# EAGLE board Qwiic_1.8V_Adapter-Panel (EAGLE 9.5.2), part 1 of 3
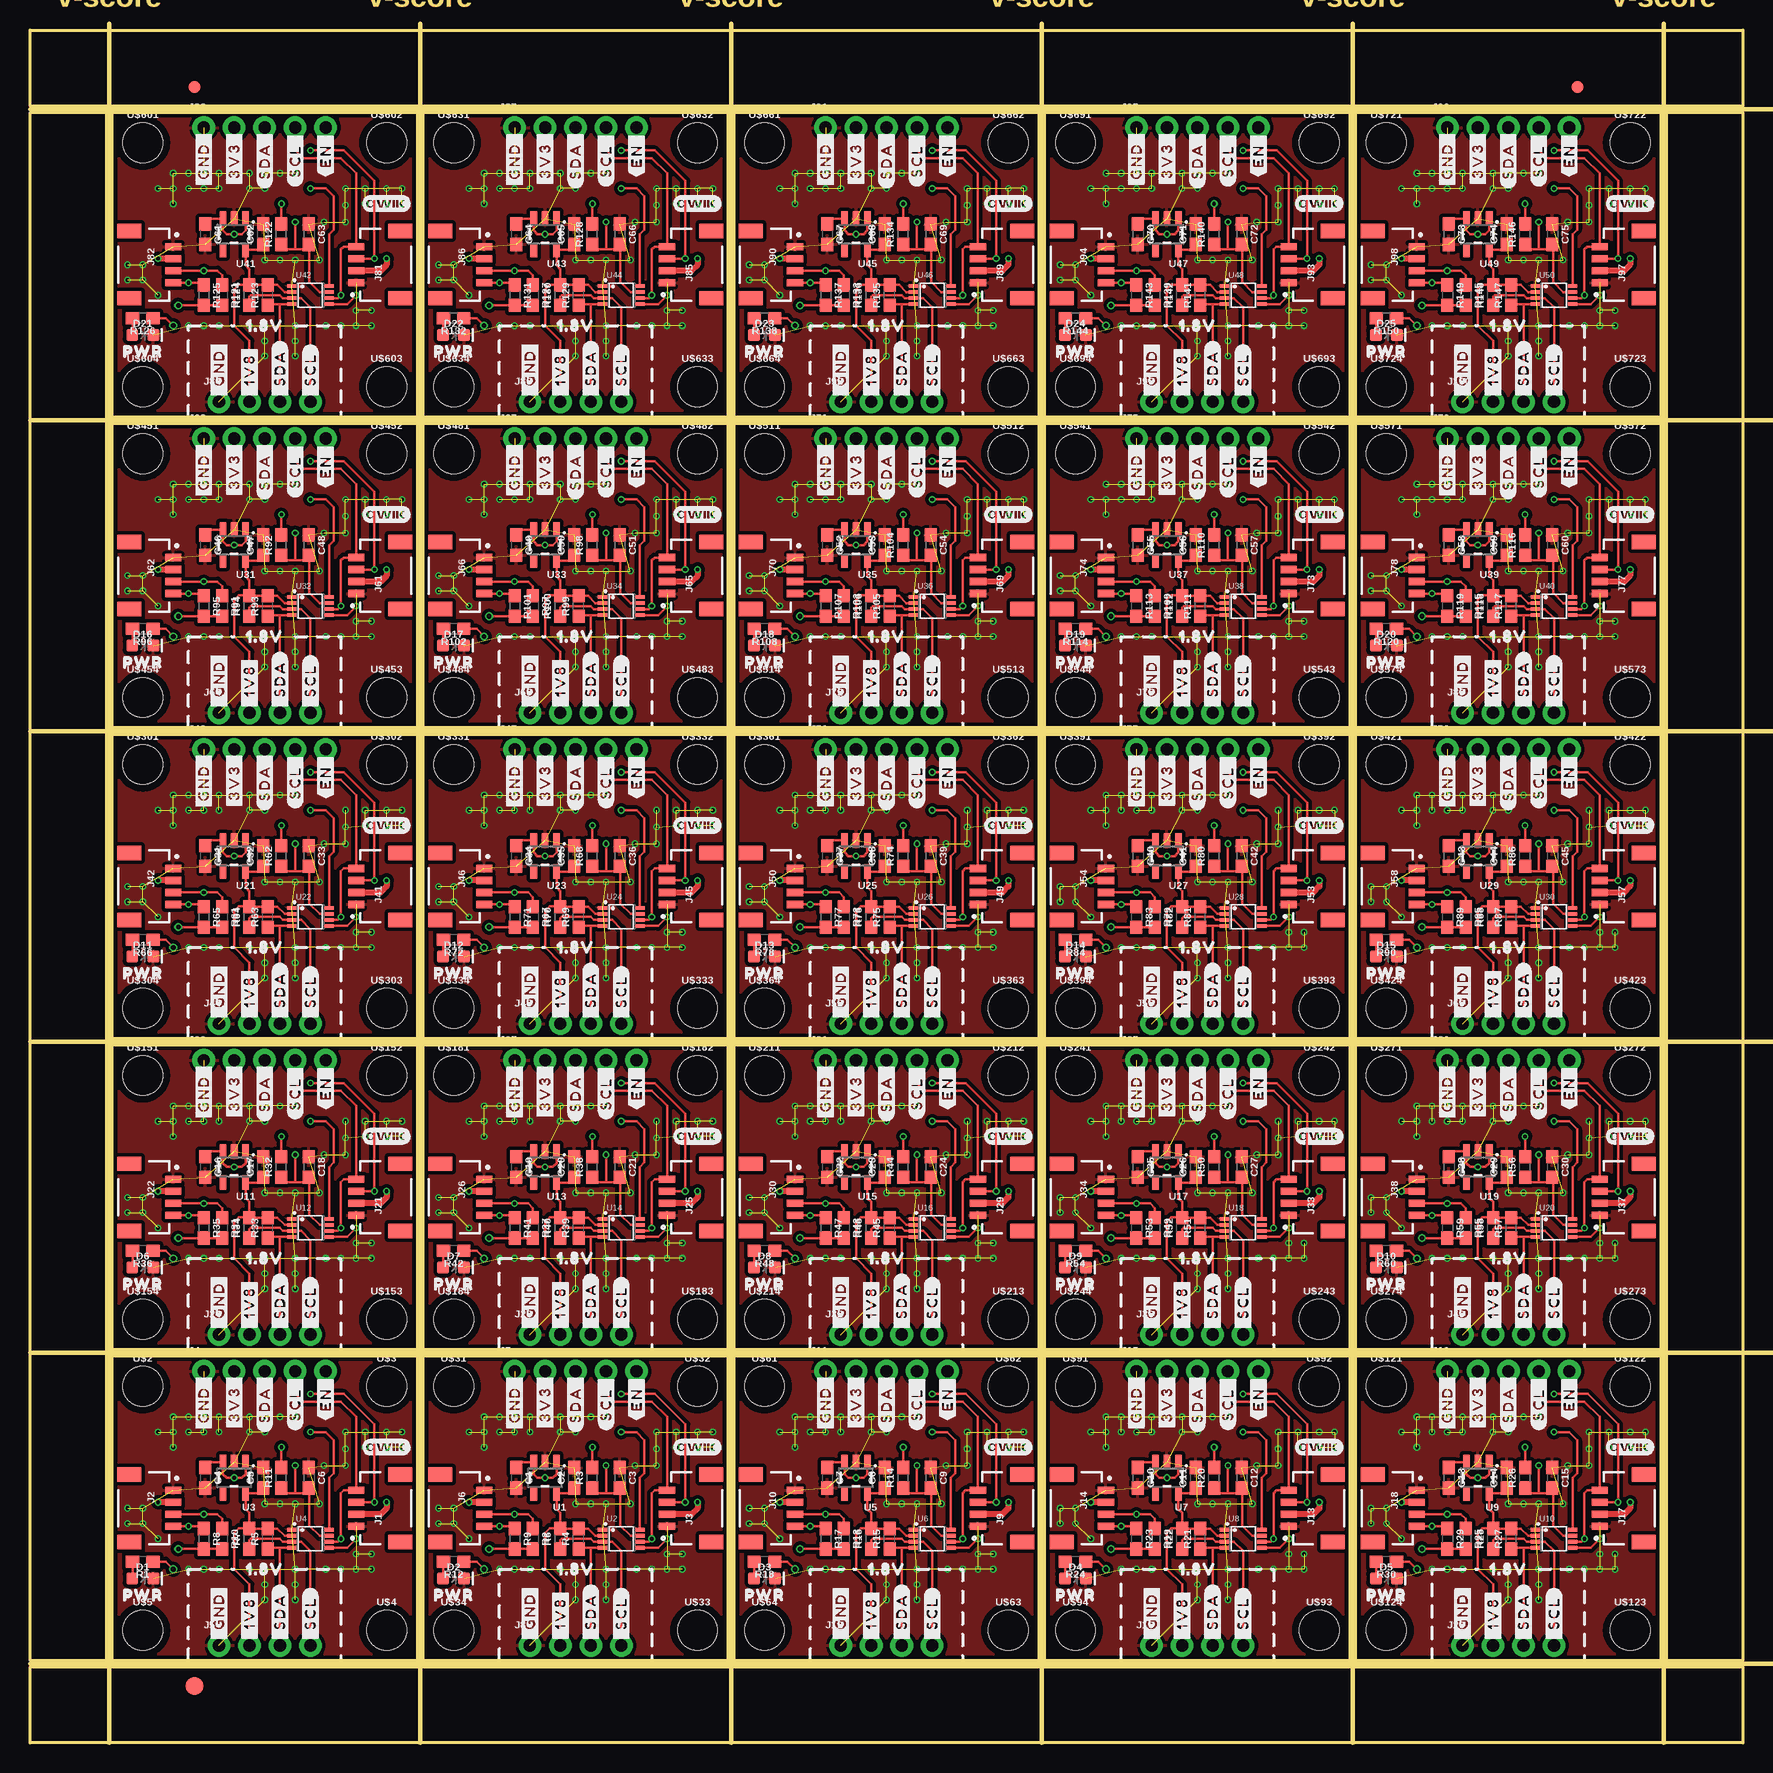
[diagram p0: board, top side]
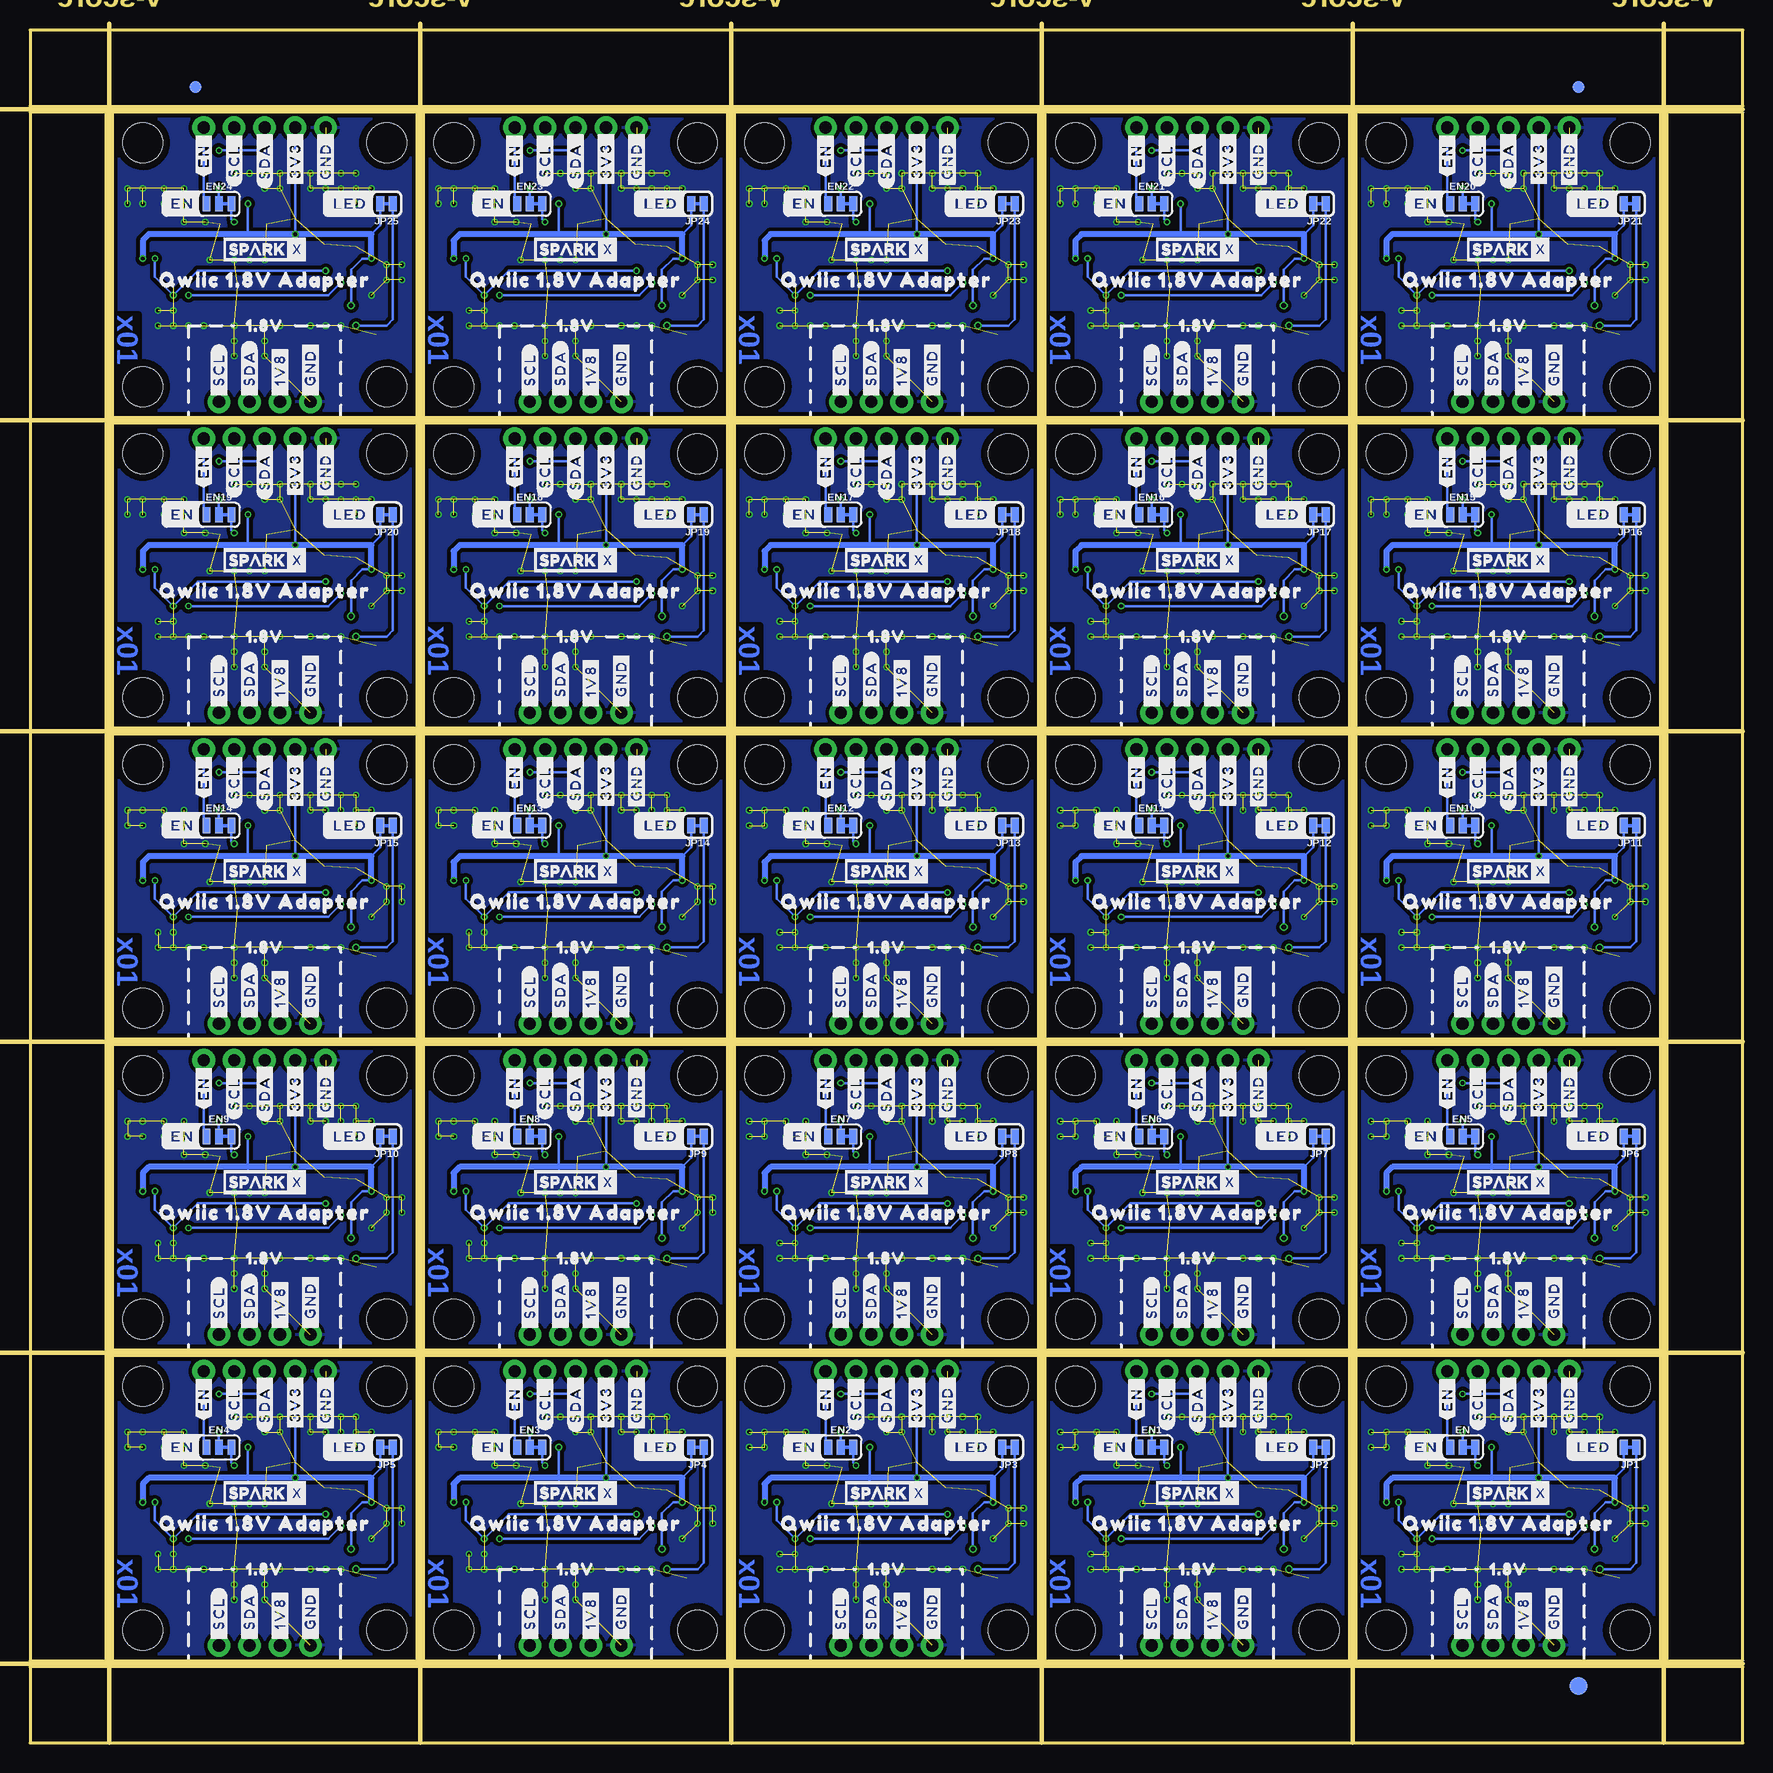
[diagram p1: board, bottom side, seen from below]

Size 142.75 x 142.75 mm. Coordinates in mm from the lower left corner, seen from the top.
Outline: 6.86,6.86 6.86,32.26 32.26,32.26 32.26,6.86 6.86,6.86
Outline: 32.77,6.86 32.77,32.26 58.17,32.26 58.17,6.86 32.77,6.86
Outline: 58.67,6.86 58.67,32.26 84.07,32.26 84.07,6.86 58.67,6.86
Outline: 84.58,6.86 84.58,32.26 109.98,32.26 109.98,6.86 84.58,6.86
Outline: 110.49,6.86 110.49,32.26 135.89,32.26 135.89,6.86 110.49,6.86
Outline: 6.86,32.77 6.86,58.17 32.26,58.17 32.26,32.77 6.86,32.77
Outline: 32.77,32.77 32.77,58.17 58.17,58.17 58.17,32.77 32.77,32.77
Outline: 58.67,32.77 58.67,58.17 84.07,58.17 84.07,32.77 58.67,32.77
Outline: 84.58,32.77 84.58,58.17 109.98,58.17 109.98,32.77 84.58,32.77
Outline: 110.49,32.77 110.49,58.17 135.89,58.17 135.89,32.77 110.49,32.77
Outline: 6.86,58.67 6.86,84.07 32.26,84.07 32.26,58.67 6.86,58.67
Outline: 32.77,58.67 32.77,84.07 58.17,84.07 58.17,58.67 32.77,58.67
Outline: 58.67,58.67 58.67,84.07 84.07,84.07 84.07,58.67 58.67,58.67
Outline: 84.58,58.67 84.58,84.07 109.98,84.07 109.98,58.67 84.58,58.67
Outline: 110.49,58.67 110.49,84.07 135.89,84.07 135.89,58.67 110.49,58.67
Outline: 6.86,84.58 6.86,109.98 32.26,109.98 32.26,84.58 6.86,84.58
Outline: 32.77,84.58 32.77,109.98 58.17,109.98 58.17,84.58 32.77,84.58
Outline: 58.67,84.58 58.67,109.98 84.07,109.98 84.07,84.58 58.67,84.58
Outline: 84.58,84.58 84.58,109.98 109.98,109.98 109.98,84.58 84.58,84.58
Outline: 110.49,84.58 110.49,109.98 135.89,109.98 135.89,84.58 110.49,84.58
Outline: 6.86,110.49 6.86,135.89 32.26,135.89 32.26,110.49 6.86,110.49
Outline: 32.77,110.49 32.77,135.89 58.17,135.89 58.17,110.49 32.77,110.49
Outline: 58.67,110.49 58.67,135.89 84.07,135.89 84.07,110.49 58.67,110.49
Outline: 84.58,110.49 84.58,135.89 109.98,135.89 109.98,110.49 84.58,110.49
Outline: 110.49,110.49 110.49,135.89 135.89,135.89 135.89,110.49 110.49,110.49
Outline: 0,6.35 142.75,6.35 142.75,0 0,0 0,6.35
Outline: 136.4,135.89 142.75,135.89 142.75,6.86 136.4,6.86 136.4,135.89
Outline: 0,142.75 142.75,142.75 142.75,136.4 0,136.4 0,142.75
Outline: 0,135.89 6.35,135.89 6.35,6.86 0,6.86 0,135.89
Copper layers (1*16): Top 0.035mm / dielectric 1.5mm / Bottom 0.035mm
Design rules "Qwiic_1.8V_Adapter": minimum track width 5mil, minimum drill 0.3mm, track to track 5mil, track to pad 5mil, pad to pad 5mil, via to via 5mil, smd to smd 5mil, copper to edge 7mil, drill to drill 7mil, minimum pad ring 5mil, minimum via ring 5mil, stop-mask expansion 4mil, vias tented up to drill 25mil, thermal gap 10mil
Milling: 12 lines

## Footprints (pad centres in the part's own frame; a part is rotated, then mirrored left to right if it is on the bottom)
0603 = smd 1.1 x 1: 1 -0.85,0; 2 0.85,0
LED-0603 = smd 1 x 1: A -0.877,0; C 0.877,0
FIDUCIAL-1X2 = smd 1 x 1: 1 0,0
FIDUCIAL-1.5X3 = smd 1.5 x 1.5: 1 0,0
SMT-JUMPER_3_1-NC_TRACE_SILK = smd 0.66 x 1.27: 1 -1.041,0; 2 0,0; 3 1.041,0
JST04_1MM_RA = smd 0.6 x 1.35: 1 -1.5,0; 2 -0.5,0; 3 0.5,0; 4 1.5,0 | smd 1.2 x 2: NC1 2.8,-3.675; NC2 -2.8,-3.675
1X05_NO_SILK = drill 1.016 pad 1.88: 1 0,0; 2 2.54,0; 3 5.08,0; 4 7.62,0; 5 10.16,0
1X04_NO_SILK = drill 1.016 pad 1.88: 1 0,0; 2 2.54,0; 3 5.08,0; 4 7.62,0
SMT-JUMPER_2_NC_TRACE_SILK = smd 0.66 x 1.27: 1 -0.521,0; 2 0.521,0
SOT23-5 = smd 0.55 x 1.2: 1 -0.95,-1.3; 2 0,-1.3; 3 0.95,-1.3; 4 0.95,1.3; 5 -0.95,1.3
VSSOP_8PIN = smd 0.8 x 0.3: P1 -1.55,0.75; P2 -1.55,0.25; P3 -1.55,-0.25; P4 -1.55,-0.75; P5 1.55,-0.75; P6 1.55,-0.25; P7 1.55,0.25; P8 1.55,0.75
STAND-OFF = hole 3.302: 0,0

## Placement (x,y rotation side)
C1  1.0uF  [0603]  40.51,22.1 270 top
C2  1.0uF  [0603]  45.34,22.1 90 top
C3  100pF  [0603]  49.15,22.1 270 top
C4  1.0uF  [0603]  14.61,22.1 270 top
C5  1.0uF  [0603]  19.43,22.1 90 top
C6  100pF  [0603]  23.24,22.1 270 top
C7  1.0uF  [0603]  66.42,22.1 270 top
C8  1.0uF  [0603]  71.25,22.1 90 top
C9  100pF  [0603]  75.06,22.1 270 top
C10  1.0uF  [0603]  92.33,22.1 270 top
C11  1.0uF  [0603]  97.16,22.1 90 top
C12  100pF  [0603]  100.97,22.1 270 top
C13  1.0uF  [0603]  118.24,22.1 270 top
C14  1.0uF  [0603]  123.06,22.1 90 top
C15  100pF  [0603]  126.87,22.1 270 top
C16  1.0uF  [0603]  14.61,48.01 270 top
C17  1.0uF  [0603]  19.43,48.01 90 top
C18  100pF  [0603]  23.24,48.01 270 top
C19  1.0uF  [0603]  40.51,48.01 270 top
C20  1.0uF  [0603]  45.34,48.01 90 top
C21  100pF  [0603]  49.15,48.01 270 top
C22  1.0uF  [0603]  66.42,48.01 270 top
C23  1.0uF  [0603]  71.25,48.01 90 top
C24  100pF  [0603]  75.06,48.01 270 top
C25  1.0uF  [0603]  92.33,48.01 270 top
C26  1.0uF  [0603]  97.16,48.01 90 top
C27  100pF  [0603]  100.97,48.01 270 top
C28  1.0uF  [0603]  118.24,48.01 270 top
C29  1.0uF  [0603]  123.06,48.01 90 top
C30  100pF  [0603]  126.87,48.01 270 top
C31  1.0uF  [0603]  14.61,73.91 270 top
C32  1.0uF  [0603]  19.43,73.91 90 top
C33  100pF  [0603]  23.24,73.91 270 top
C34  1.0uF  [0603]  40.51,73.91 270 top
C35  1.0uF  [0603]  45.34,73.91 90 top
C36  100pF  [0603]  49.15,73.91 270 top
C37  1.0uF  [0603]  66.42,73.91 270 top
C38  1.0uF  [0603]  71.25,73.91 90 top
C39  100pF  [0603]  75.06,73.91 270 top
C40  1.0uF  [0603]  92.33,73.91 270 top
C41  1.0uF  [0603]  97.16,73.91 90 top
C42  100pF  [0603]  100.97,73.91 270 top
C43  1.0uF  [0603]  118.24,73.91 270 top
C44  1.0uF  [0603]  123.06,73.91 90 top
C45  100pF  [0603]  126.87,73.91 270 top
C46  1.0uF  [0603]  14.61,99.82 270 top
C47  1.0uF  [0603]  19.43,99.82 90 top
C48  100pF  [0603]  23.24,99.82 270 top
C49  1.0uF  [0603]  40.51,99.82 270 top
C50  1.0uF  [0603]  45.34,99.82 90 top
C51  100pF  [0603]  49.15,99.82 270 top
C52  1.0uF  [0603]  66.42,99.82 270 top
C53  1.0uF  [0603]  71.25,99.82 90 top
C54  100pF  [0603]  75.06,99.82 270 top
C55  1.0uF  [0603]  92.33,99.82 270 top
C56  1.0uF  [0603]  97.16,99.82 90 top
C57  100pF  [0603]  100.97,99.82 270 top
C58  1.0uF  [0603]  118.24,99.82 270 top
C59  1.0uF  [0603]  123.06,99.82 90 top
C60  100pF  [0603]  126.87,99.82 270 top
C61  1.0uF  [0603]  14.61,125.73 270 top
C62  1.0uF  [0603]  19.43,125.73 90 top
C63  100pF  [0603]  23.24,125.73 270 top
C64  1.0uF  [0603]  40.51,125.73 270 top
C65  1.0uF  [0603]  45.34,125.73 90 top
C66  100pF  [0603]  49.15,125.73 270 top
C67  1.0uF  [0603]  66.42,125.73 270 top
C68  1.0uF  [0603]  71.25,125.73 90 top
C69  100pF  [0603]  75.06,125.73 270 top
C70  1.0uF  [0603]  92.33,125.73 270 top
C71  1.0uF  [0603]  97.16,125.73 90 top
C72  100pF  [0603]  100.97,125.73 270 top
C73  1.0uF  [0603]  118.24,125.73 270 top
C74  1.0uF  [0603]  123.06,125.73 90 top
C75  100pF  [0603]  126.87,125.73 270 top
D1  RED  [LED-0603]  9.4,13.72 0 top
D2  RED  [LED-0603]  35.31,13.72 0 top
D3  RED  [LED-0603]  61.21,13.72 0 top
D4  RED  [LED-0603]  87.12,13.72 0 top
D5  RED  [LED-0603]  113.03,13.72 0 top
D6  RED  [LED-0603]  9.4,39.62 0 top
D7  RED  [LED-0603]  35.31,39.62 0 top
D8  RED  [LED-0603]  61.21,39.62 0 top
D9  RED  [LED-0603]  87.12,39.62 0 top
D10  RED  [LED-0603]  113.03,39.62 0 top
D11  RED  [LED-0603]  9.4,65.53 0 top
D12  RED  [LED-0603]  35.31,65.53 0 top
D13  RED  [LED-0603]  61.21,65.53 0 top
D14  RED  [LED-0603]  87.12,65.53 0 top
D15  RED  [LED-0603]  113.03,65.53 0 top
D16  RED  [LED-0603]  9.4,91.44 0 top
D17  RED  [LED-0603]  35.31,91.44 0 top
D18  RED  [LED-0603]  61.21,91.44 0 top
D19  RED  [LED-0603]  87.12,91.44 0 top
D20  RED  [LED-0603]  113.03,91.44 0 top
D21  RED  [LED-0603]  9.4,117.35 0 top
D22  RED  [LED-0603]  35.31,117.35 0 top
D23  RED  [LED-0603]  61.21,117.35 0 top
D24  RED  [LED-0603]  87.12,117.35 0 top
D25  RED  [LED-0603]  113.03,117.35 0 top
E$1  [FIDUCIAL-1X2]  13.72,137.99 0 top
E$2  [FIDUCIAL-1X2]  13.72,137.99 0 bottom
E$3  [FIDUCIAL-1X2]  128.97,137.99 0 top
E$4  [FIDUCIAL-1X2]  128.97,137.99 0 bottom
E$5  [FIDUCIAL-1.5X3]  13.72,4.76 0 top
E$6  [FIDUCIAL-1.5X3]  13.72,4.76 0 bottom
EN  JUMPER-SMT_3_1-NC_TRACE_SILK  [SMT-JUMPER_3_1-NC_TRACE_SILK]  23.37,24.64 0 bottom
EN1  JUMPER-SMT_3_1-NC_TRACE_SILK  [SMT-JUMPER_3_1-NC_TRACE_SILK]  49.28,24.64 0 bottom
EN2  JUMPER-SMT_3_1-NC_TRACE_SILK  [SMT-JUMPER_3_1-NC_TRACE_SILK]  75.18,24.64 0 bottom
EN3  JUMPER-SMT_3_1-NC_TRACE_SILK  [SMT-JUMPER_3_1-NC_TRACE_SILK]  101.09,24.64 0 bottom
EN4  JUMPER-SMT_3_1-NC_TRACE_SILK  [SMT-JUMPER_3_1-NC_TRACE_SILK]  127,24.64 0 bottom
EN5  JUMPER-SMT_3_1-NC_TRACE_SILK  [SMT-JUMPER_3_1-NC_TRACE_SILK]  23.37,50.55 0 bottom
EN6  JUMPER-SMT_3_1-NC_TRACE_SILK  [SMT-JUMPER_3_1-NC_TRACE_SILK]  49.28,50.55 0 bottom
EN7  JUMPER-SMT_3_1-NC_TRACE_SILK  [SMT-JUMPER_3_1-NC_TRACE_SILK]  75.18,50.55 0 bottom
EN8  JUMPER-SMT_3_1-NC_TRACE_SILK  [SMT-JUMPER_3_1-NC_TRACE_SILK]  101.09,50.55 0 bottom
EN9  JUMPER-SMT_3_1-NC_TRACE_SILK  [SMT-JUMPER_3_1-NC_TRACE_SILK]  127,50.55 0 bottom
EN10  JUMPER-SMT_3_1-NC_TRACE_SILK  [SMT-JUMPER_3_1-NC_TRACE_SILK]  23.37,76.45 0 bottom
EN11  JUMPER-SMT_3_1-NC_TRACE_SILK  [SMT-JUMPER_3_1-NC_TRACE_SILK]  49.28,76.45 0 bottom
EN12  JUMPER-SMT_3_1-NC_TRACE_SILK  [SMT-JUMPER_3_1-NC_TRACE_SILK]  75.18,76.45 0 bottom
EN13  JUMPER-SMT_3_1-NC_TRACE_SILK  [SMT-JUMPER_3_1-NC_TRACE_SILK]  101.09,76.45 0 bottom
EN14  JUMPER-SMT_3_1-NC_TRACE_SILK  [SMT-JUMPER_3_1-NC_TRACE_SILK]  127,76.45 0 bottom
EN15  JUMPER-SMT_3_1-NC_TRACE_SILK  [SMT-JUMPER_3_1-NC_TRACE_SILK]  23.37,102.36 0 bottom
EN16  JUMPER-SMT_3_1-NC_TRACE_SILK  [SMT-JUMPER_3_1-NC_TRACE_SILK]  49.28,102.36 0 bottom
EN17  JUMPER-SMT_3_1-NC_TRACE_SILK  [SMT-JUMPER_3_1-NC_TRACE_SILK]  75.18,102.36 0 bottom
EN18  JUMPER-SMT_3_1-NC_TRACE_SILK  [SMT-JUMPER_3_1-NC_TRACE_SILK]  101.09,102.36 0 bottom
EN19  JUMPER-SMT_3_1-NC_TRACE_SILK  [SMT-JUMPER_3_1-NC_TRACE_SILK]  127,102.36 0 bottom
EN20  JUMPER-SMT_3_1-NC_TRACE_SILK  [SMT-JUMPER_3_1-NC_TRACE_SILK]  23.37,128.27 0 bottom
EN21  JUMPER-SMT_3_1-NC_TRACE_SILK  [SMT-JUMPER_3_1-NC_TRACE_SILK]  49.28,128.27 0 bottom
EN22  JUMPER-SMT_3_1-NC_TRACE_SILK  [SMT-JUMPER_3_1-NC_TRACE_SILK]  75.18,128.27 0 bottom
EN23  JUMPER-SMT_3_1-NC_TRACE_SILK  [SMT-JUMPER_3_1-NC_TRACE_SILK]  101.09,128.27 0 bottom
EN24  JUMPER-SMT_3_1-NC_TRACE_SILK  [SMT-JUMPER_3_1-NC_TRACE_SILK]  127,128.27 0 bottom
J1  QWIIC_RIGHT_ANGLE  [JST04_1MM_RA]  27.18,19.56 90 top
J2  QWIIC_RIGHT_ANGLE  [JST04_1MM_RA]  11.94,19.56 270 top
J3  QWIIC_RIGHT_ANGLE  [JST04_1MM_RA]  53.09,19.56 90 top
J4  [1X05_NO_SILK]  14.48,30.99 0 top
J5  [1X04_NO_SILK]  15.75,8.13 0 top
J6  QWIIC_RIGHT_ANGLE  [JST04_1MM_RA]  37.85,19.56 270 top
J7  [1X05_NO_SILK]  40.39,30.99 0 top
J8  [1X04_NO_SILK]  41.66,8.13 0 top
J9  QWIIC_RIGHT_ANGLE  [JST04_1MM_RA]  78.99,19.56 90 top
J10  QWIIC_RIGHT_ANGLE  [JST04_1MM_RA]  63.75,19.56 270 top
J11  [1X05_NO_SILK]  66.29,30.99 0 top
J12  [1X04_NO_SILK]  67.56,8.13 0 top
J13  QWIIC_RIGHT_ANGLE  [JST04_1MM_RA]  104.9,19.56 90 top
J14  QWIIC_RIGHT_ANGLE  [JST04_1MM_RA]  89.66,19.56 270 top
J15  [1X05_NO_SILK]  92.2,30.99 0 top
J16  [1X04_NO_SILK]  93.47,8.13 0 top
J17  QWIIC_RIGHT_ANGLE  [JST04_1MM_RA]  130.81,19.56 90 top
J18  QWIIC_RIGHT_ANGLE  [JST04_1MM_RA]  115.57,19.56 270 top
J19  [1X05_NO_SILK]  118.11,30.99 0 top
J20  [1X04_NO_SILK]  119.38,8.13 0 top
J21  QWIIC_RIGHT_ANGLE  [JST04_1MM_RA]  27.18,45.47 90 top
J22  QWIIC_RIGHT_ANGLE  [JST04_1MM_RA]  11.94,45.47 270 top
J23  [1X05_NO_SILK]  14.48,56.9 0 top
J24  [1X04_NO_SILK]  15.75,34.04 0 top
J25  QWIIC_RIGHT_ANGLE  [JST04_1MM_RA]  53.09,45.47 90 top
J26  QWIIC_RIGHT_ANGLE  [JST04_1MM_RA]  37.85,45.47 270 top
J27  [1X05_NO_SILK]  40.39,56.9 0 top
J28  [1X04_NO_SILK]  41.66,34.04 0 top
J29  QWIIC_RIGHT_ANGLE  [JST04_1MM_RA]  78.99,45.47 90 top
J30  QWIIC_RIGHT_ANGLE  [JST04_1MM_RA]  63.75,45.47 270 top
J31  [1X05_NO_SILK]  66.29,56.9 0 top
J32  [1X04_NO_SILK]  67.56,34.04 0 top
J33  QWIIC_RIGHT_ANGLE  [JST04_1MM_RA]  104.9,45.47 90 top
J34  QWIIC_RIGHT_ANGLE  [JST04_1MM_RA]  89.66,45.47 270 top
J35  [1X05_NO_SILK]  92.2,56.9 0 top
J36  [1X04_NO_SILK]  93.47,34.04 0 top
J37  QWIIC_RIGHT_ANGLE  [JST04_1MM_RA]  130.81,45.47 90 top
J38  QWIIC_RIGHT_ANGLE  [JST04_1MM_RA]  115.57,45.47 270 top
J39  [1X05_NO_SILK]  118.11,56.9 0 top
J40  [1X04_NO_SILK]  119.38,34.04 0 top
J41  QWIIC_RIGHT_ANGLE  [JST04_1MM_RA]  27.18,71.37 90 top
J42  QWIIC_RIGHT_ANGLE  [JST04_1MM_RA]  11.94,71.37 270 top
J43  [1X05_NO_SILK]  14.48,82.8 0 top
J44  [1X04_NO_SILK]  15.75,59.94 0 top
J45  QWIIC_RIGHT_ANGLE  [JST04_1MM_RA]  53.09,71.37 90 top
J46  QWIIC_RIGHT_ANGLE  [JST04_1MM_RA]  37.85,71.37 270 top
J47  [1X05_NO_SILK]  40.39,82.8 0 top
J48  [1X04_NO_SILK]  41.66,59.94 0 top
J49  QWIIC_RIGHT_ANGLE  [JST04_1MM_RA]  78.99,71.37 90 top
J50  QWIIC_RIGHT_ANGLE  [JST04_1MM_RA]  63.75,71.37 270 top
J51  [1X05_NO_SILK]  66.29,82.8 0 top
J52  [1X04_NO_SILK]  67.56,59.94 0 top
J53  QWIIC_RIGHT_ANGLE  [JST04_1MM_RA]  104.9,71.37 90 top
J54  QWIIC_RIGHT_ANGLE  [JST04_1MM_RA]  89.66,71.37 270 top
J55  [1X05_NO_SILK]  92.2,82.8 0 top
J56  [1X04_NO_SILK]  93.47,59.94 0 top
J57  QWIIC_RIGHT_ANGLE  [JST04_1MM_RA]  130.81,71.37 90 top
J58  QWIIC_RIGHT_ANGLE  [JST04_1MM_RA]  115.57,71.37 270 top
J59  [1X05_NO_SILK]  118.11,82.8 0 top
J60  [1X04_NO_SILK]  119.38,59.94 0 top
J61  QWIIC_RIGHT_ANGLE  [JST04_1MM_RA]  27.18,97.28 90 top
J62  QWIIC_RIGHT_ANGLE  [JST04_1MM_RA]  11.94,97.28 270 top
J63  [1X05_NO_SILK]  14.48,108.71 0 top
J64  [1X04_NO_SILK]  15.75,85.85 0 top
J65  QWIIC_RIGHT_ANGLE  [JST04_1MM_RA]  53.09,97.28 90 top
J66  QWIIC_RIGHT_ANGLE  [JST04_1MM_RA]  37.85,97.28 270 top
J67  [1X05_NO_SILK]  40.39,108.71 0 top
J68  [1X04_NO_SILK]  41.66,85.85 0 top
J69  QWIIC_RIGHT_ANGLE  [JST04_1MM_RA]  78.99,97.28 90 top
J70  QWIIC_RIGHT_ANGLE  [JST04_1MM_RA]  63.75,97.28 270 top
J71  [1X05_NO_SILK]  66.29,108.71 0 top
J72  [1X04_NO_SILK]  67.56,85.85 0 top
J73  QWIIC_RIGHT_ANGLE  [JST04_1MM_RA]  104.9,97.28 90 top
J74  QWIIC_RIGHT_ANGLE  [JST04_1MM_RA]  89.66,97.28 270 top
J75  [1X05_NO_SILK]  92.2,108.71 0 top
J76  [1X04_NO_SILK]  93.47,85.85 0 top
J77  QWIIC_RIGHT_ANGLE  [JST04_1MM_RA]  130.81,97.28 90 top
J78  QWIIC_RIGHT_ANGLE  [JST04_1MM_RA]  115.57,97.28 270 top
J79  [1X05_NO_SILK]  118.11,108.71 0 top
J80  [1X04_NO_SILK]  119.38,85.85 0 top
J81  QWIIC_RIGHT_ANGLE  [JST04_1MM_RA]  27.18,123.19 90 top
J82  QWIIC_RIGHT_ANGLE  [JST04_1MM_RA]  11.94,123.19 270 top
J83  [1X05_NO_SILK]  14.48,134.62 0 top
J84  [1X04_NO_SILK]  15.75,111.76 0 top
J85  QWIIC_RIGHT_ANGLE  [JST04_1MM_RA]  53.09,123.19 90 top
J86  QWIIC_RIGHT_ANGLE  [JST04_1MM_RA]  37.85,123.19 270 top
J87  [1X05_NO_SILK]  40.39,134.62 0 top
J88  [1X04_NO_SILK]  41.66,111.76 0 top
J89  QWIIC_RIGHT_ANGLE  [JST04_1MM_RA]  78.99,123.19 90 top
J90  QWIIC_RIGHT_ANGLE  [JST04_1MM_RA]  63.75,123.19 270 top
J91  [1X05_NO_SILK]  66.29,134.62 0 top
J92  [1X04_NO_SILK]  67.56,111.76 0 top
J93  QWIIC_RIGHT_ANGLE  [JST04_1MM_RA]  104.9,123.19 90 top
J94  QWIIC_RIGHT_ANGLE  [JST04_1MM_RA]  89.66,123.19 270 top
J95  [1X05_NO_SILK]  92.2,134.62 0 top
J96  [1X04_NO_SILK]  93.47,111.76 0 top
J97  QWIIC_RIGHT_ANGLE  [JST04_1MM_RA]  130.81,123.19 90 top
J98  QWIIC_RIGHT_ANGLE  [JST04_1MM_RA]  115.57,123.19 270 top
J99  [1X05_NO_SILK]  118.11,134.62 0 top
J100  [1X04_NO_SILK]  119.38,111.76 0 top
JP1  JUMPER-SMT_2_NC_TRACE_SILK  [SMT-JUMPER_2_NC_TRACE_SILK]  9.4,24.64 180 bottom
JP2  JUMPER-SMT_2_NC_TRACE_SILK  [SMT-JUMPER_2_NC_TRACE_SILK]  35.31,24.64 180 bottom
JP3  JUMPER-SMT_2_NC_TRACE_SILK  [SMT-JUMPER_2_NC_TRACE_SILK]  61.21,24.64 180 bottom
JP4  JUMPER-SMT_2_NC_TRACE_SILK  [SMT-JUMPER_2_NC_TRACE_SILK]  87.12,24.64 180 bottom
JP5  JUMPER-SMT_2_NC_TRACE_SILK  [SMT-JUMPER_2_NC_TRACE_SILK]  113.03,24.64 180 bottom
JP6  JUMPER-SMT_2_NC_TRACE_SILK  [SMT-JUMPER_2_NC_TRACE_SILK]  9.4,50.55 180 bottom
JP7  JUMPER-SMT_2_NC_TRACE_SILK  [SMT-JUMPER_2_NC_TRACE_SILK]  35.31,50.55 180 bottom
JP8  JUMPER-SMT_2_NC_TRACE_SILK  [SMT-JUMPER_2_NC_TRACE_SILK]  61.21,50.55 180 bottom
JP9  JUMPER-SMT_2_NC_TRACE_SILK  [SMT-JUMPER_2_NC_TRACE_SILK]  87.12,50.55 180 bottom
JP10  JUMPER-SMT_2_NC_TRACE_SILK  [SMT-JUMPER_2_NC_TRACE_SILK]  113.03,50.55 180 bottom
JP11  JUMPER-SMT_2_NC_TRACE_SILK  [SMT-JUMPER_2_NC_TRACE_SILK]  9.4,76.45 180 bottom
JP12  JUMPER-SMT_2_NC_TRACE_SILK  [SMT-JUMPER_2_NC_TRACE_SILK]  35.31,76.45 180 bottom
JP13  JUMPER-SMT_2_NC_TRACE_SILK  [SMT-JUMPER_2_NC_TRACE_SILK]  61.21,76.45 180 bottom
JP14  JUMPER-SMT_2_NC_TRACE_SILK  [SMT-JUMPER_2_NC_TRACE_SILK]  87.12,76.45 180 bottom
JP15  JUMPER-SMT_2_NC_TRACE_SILK  [SMT-JUMPER_2_NC_TRACE_SILK]  113.03,76.45 180 bottom
JP16  JUMPER-SMT_2_NC_TRACE_SILK  [SMT-JUMPER_2_NC_TRACE_SILK]  9.4,102.36 180 bottom
JP17  JUMPER-SMT_2_NC_TRACE_SILK  [SMT-JUMPER_2_NC_TRACE_SILK]  35.31,102.36 180 bottom
JP18  JUMPER-SMT_2_NC_TRACE_SILK  [SMT-JUMPER_2_NC_TRACE_SILK]  61.21,102.36 180 bottom
JP19  JUMPER-SMT_2_NC_TRACE_SILK  [SMT-JUMPER_2_NC_TRACE_SILK]  87.12,102.36 180 bottom
JP20  JUMPER-SMT_2_NC_TRACE_SILK  [SMT-JUMPER_2_NC_TRACE_SILK]  113.03,102.36 180 bottom
JP21  JUMPER-SMT_2_NC_TRACE_SILK  [SMT-JUMPER_2_NC_TRACE_SILK]  9.4,128.27 180 bottom
JP22  JUMPER-SMT_2_NC_TRACE_SILK  [SMT-JUMPER_2_NC_TRACE_SILK]  35.31,128.27 180 bottom
JP23  JUMPER-SMT_2_NC_TRACE_SILK  [SMT-JUMPER_2_NC_TRACE_SILK]  61.21,128.27 180 bottom
JP24  JUMPER-SMT_2_NC_TRACE_SILK  [SMT-JUMPER_2_NC_TRACE_SILK]  87.12,128.27 180 bottom
JP25  JUMPER-SMT_2_NC_TRACE_SILK  [SMT-JUMPER_2_NC_TRACE_SILK]  113.03,128.27 180 bottom
R1  1k  [0603]  9.4,15.11 180 top
R2  2.2k  [0603]  41.91,17.02 270 top
R3  200k  [0603]  46.86,22.1 90 top
R4  2.2k  [0603]  45.72,17.02 90 top
R5  2.2k  [0603]  19.81,17.02 90 top
R6  2.2k  [0603]  44.2,17.02 90 top
R7  2.2k  [0603]  18.29,17.02 90 top
R8  2.2k  [0603]  14.48,17.02 270 top
R9  2.2k  [0603]  40.39,17.02 270 top
R10  2.2k  [0603]  16,17.02 270 top
R11  200k  [0603]  20.95,22.1 90 top
R12  1k  [0603]  35.31,15.11 180 top
R13  2.2k  [0603]  67.82,17.02 270 top
R14  200k  [0603]  72.77,22.1 90 top
R15  2.2k  [0603]  71.63,17.02 90 top
R16  2.2k  [0603]  70.1,17.02 90 top
R17  2.2k  [0603]  66.29,17.02 270 top
R18  1k  [0603]  61.21,15.11 180 top
R19  2.2k  [0603]  93.73,17.02 270 top
R20  200k  [0603]  98.68,22.1 90 top
R21  2.2k  [0603]  97.54,17.02 90 top
R22  2.2k  [0603]  96.01,17.02 90 top
R23  2.2k  [0603]  92.2,17.02 270 top
R24  1k  [0603]  87.12,15.11 180 top
R25  2.2k  [0603]  119.63,17.02 270 top
R26  200k  [0603]  124.59,22.1 90 top
R27  2.2k  [0603]  123.44,17.02 90 top
R28  2.2k  [0603]  121.92,17.02 90 top
R29  2.2k  [0603]  118.11,17.02 270 top
R30  1k  [0603]  113.03,15.11 180 top
R31  2.2k  [0603]  16,42.93 270 top
R32  200k  [0603]  20.95,48.01 90 top
R33  2.2k  [0603]  19.81,42.93 90 top
R34  2.2k  [0603]  18.29,42.93 90 top
R35  2.2k  [0603]  14.48,42.93 270 top
R36  1k  [0603]  9.4,41.02 180 top
R37  2.2k  [0603]  41.91,42.93 270 top
R38  200k  [0603]  46.86,48.01 90 top
R39  2.2k  [0603]  45.72,42.93 90 top
R40  2.2k  [0603]  44.2,42.93 90 top
R41  2.2k  [0603]  40.39,42.93 270 top
R42  1k  [0603]  35.31,41.02 180 top
R43  2.2k  [0603]  67.82,42.93 270 top
R44  200k  [0603]  72.77,48.01 90 top
R45  2.2k  [0603]  71.63,42.93 90 top
R46  2.2k  [0603]  70.1,42.93 90 top
R47  2.2k  [0603]  66.29,42.93 270 top
R48  1k  [0603]  61.21,41.02 180 top
R49  2.2k  [0603]  93.73,42.93 270 top
R50  200k  [0603]  98.68,48.01 90 top
R51  2.2k  [0603]  97.54,42.93 90 top
R52  2.2k  [0603]  96.01,42.93 90 top
R53  2.2k  [0603]  92.2,42.93 270 top
R54  1k  [0603]  87.12,41.02 180 top
R55  2.2k  [0603]  119.63,42.93 270 top
R56  200k  [0603]  124.59,48.01 90 top
R57  2.2k  [0603]  123.44,42.93 90 top
R58  2.2k  [0603]  121.92,42.93 90 top
R59  2.2k  [0603]  118.11,42.93 270 top
R60  1k  [0603]  113.03,41.02 180 top
R61  2.2k  [0603]  16,68.83 270 top
R62  200k  [0603]  20.95,73.91 90 top
R63  2.2k  [0603]  19.81,68.83 90 top
R64  2.2k  [0603]  18.29,68.83 90 top
R65  2.2k  [0603]  14.48,68.83 270 top
R66  1k  [0603]  9.4,66.93 180 top
R67  2.2k  [0603]  41.91,68.83 270 top
R68  200k  [0603]  46.86,73.91 90 top
R69  2.2k  [0603]  45.72,68.83 90 top
R70  2.2k  [0603]  44.2,68.83 90 top
R71  2.2k  [0603]  40.39,68.83 270 top
R72  1k  [0603]  35.31,66.93 180 top
R73  2.2k  [0603]  67.82,68.83 270 top
R74  200k  [0603]  72.77,73.91 90 top
R75  2.2k  [0603]  71.63,68.83 90 top
R76  2.2k  [0603]  70.1,68.83 90 top
R77  2.2k  [0603]  66.29,68.83 270 top
R78  1k  [0603]  61.21,66.93 180 top
R79  2.2k  [0603]  93.73,68.83 270 top
R80  200k  [0603]  98.68,73.91 90 top
R81  2.2k  [0603]  97.54,68.83 90 top
R82  2.2k  [0603]  96.01,68.83 90 top
R83  2.2k  [0603]  92.2,68.83 270 top
R84  1k  [0603]  87.12,66.93 180 top
R85  2.2k  [0603]  119.63,68.83 270 top
R86  200k  [0603]  124.59,73.91 90 top
R87  2.2k  [0603]  123.44,68.83 90 top
R88  2.2k  [0603]  121.92,68.83 90 top
R89  2.2k  [0603]  118.11,68.83 270 top
R90  1k  [0603]  113.03,66.93 180 top
R91  2.2k  [0603]  16,94.74 270 top
R92  200k  [0603]  20.95,99.82 90 top
R93  2.2k  [0603]  19.81,94.74 90 top
R94  2.2k  [0603]  18.29,94.74 90 top
R95  2.2k  [0603]  14.48,94.74 270 top
R96  1k  [0603]  9.4,92.84 180 top
R97  2.2k  [0603]  41.91,94.74 270 top
R98  200k  [0603]  46.86,99.82 90 top
R99  2.2k  [0603]  45.72,94.74 90 top
R100  2.2k  [0603]  44.2,94.74 90 top
R101  2.2k  [0603]  40.39,94.74 270 top
R102  1k  [0603]  35.31,92.84 180 top
R103  2.2k  [0603]  67.82,94.74 270 top
R104  200k  [0603]  72.77,99.82 90 top
R105  2.2k  [0603]  71.63,94.74 90 top
R106  2.2k  [0603]  70.1,94.74 90 top
R107  2.2k  [0603]  66.29,94.74 270 top
R108  1k  [0603]  61.21,92.84 180 top
R109  2.2k  [0603]  93.73,94.74 270 top
R110  200k  [0603]  98.68,99.82 90 top
R111  2.2k  [0603]  97.54,94.74 90 top
R112  2.2k  [0603]  96.01,94.74 90 top
R113  2.2k  [0603]  92.2,94.74 270 top
R114  1k  [0603]  87.12,92.84 180 top
R115  2.2k  [0603]  119.63,94.74 270 top
R116  200k  [0603]  124.59,99.82 90 top
R117  2.2k  [0603]  123.44,94.74 90 top
R118  2.2k  [0603]  121.92,94.74 90 top
R119  2.2k  [0603]  118.11,94.74 270 top
R120  1k  [0603]  113.03,92.84 180 top
R121  2.2k  [0603]  16,120.65 270 top
R122  200k  [0603]  20.95,125.73 90 top
R123  2.2k  [0603]  19.81,120.65 90 top
R124  2.2k  [0603]  18.29,120.65 90 top
R125  2.2k  [0603]  14.48,120.65 270 top
R126  1k  [0603]  9.4,118.75 180 top
R127  2.2k  [0603]  41.91,120.65 270 top
R128  200k  [0603]  46.86,125.73 90 top
R129  2.2k  [0603]  45.72,120.65 90 top
R130  2.2k  [0603]  44.2,120.65 90 top
R131  2.2k  [0603]  40.39,120.65 270 top
R132  1k  [0603]  35.31,118.75 180 top
R133  2.2k  [0603]  67.82,120.65 270 top
R134  200k  [0603]  72.77,125.73 90 top
R135  2.2k  [0603]  71.63,120.65 90 top
R136  2.2k  [0603]  70.1,120.65 90 top
R137  2.2k  [0603]  66.29,120.65 270 top
R138  1k  [0603]  61.21,118.75 180 top
R139  2.2k  [0603]  93.73,120.65 270 top
R140  200k  [0603]  98.68,125.73 90 top
R141  2.2k  [0603]  97.54,120.65 90 top
R142  2.2k  [0603]  96.01,120.65 90 top
R143  2.2k  [0603]  92.2,120.65 270 top
R144  1k  [0603]  87.12,118.75 180 top
R145  2.2k  [0603]  119.63,120.65 270 top
R146  200k  [0603]  124.59,125.73 90 top
R147  2.2k  [0603]  123.44,120.65 90 top
R148  2.2k  [0603]  121.92,120.65 90 top
R149  2.2k  [0603]  118.11,120.65 270 top
R150  1k  [0603]  113.03,118.75 180 top
U1  AP2127K-1.8V  [SOT23-5]  42.93,22.1 180 top
U2  [VSSOP_8PIN]  49.28,17.02 0 top
U3  AP2127K-1.8V  [SOT23-5]  17.02,22.1 180 top
U4  [VSSOP_8PIN]  23.37,17.02 0 top
U5  AP2127K-1.8V  [SOT23-5]  68.83,22.1 180 top
U6  [VSSOP_8PIN]  75.18,17.02 0 top
U7  AP2127K-1.8V  [SOT23-5]  94.74,22.1 180 top
U8  [VSSOP_8PIN]  101.09,17.02 0 top
U9  AP2127K-1.8V  [SOT23-5]  120.65,22.1 180 top
U10  [VSSOP_8PIN]  127,17.02 0 top
U11  AP2127K-1.8V  [SOT23-5]  17.02,48.01 180 top
U12  [VSSOP_8PIN]  23.37,42.93 0 top
U13  AP2127K-1.8V  [SOT23-5]  42.93,48.01 180 top
U14  [VSSOP_8PIN]  49.28,42.93 0 top
U15  AP2127K-1.8V  [SOT23-5]  68.83,48.01 180 top
U16  [VSSOP_8PIN]  75.18,42.93 0 top
U17  AP2127K-1.8V  [SOT23-5]  94.74,48.01 180 top
U18  [VSSOP_8PIN]  101.09,42.93 0 top
U19  AP2127K-1.8V  [SOT23-5]  120.65,48.01 180 top
U20  [VSSOP_8PIN]  127,42.93 0 top
U21  AP2127K-1.8V  [SOT23-5]  17.02,73.91 180 top
U22  [VSSOP_8PIN]  23.37,68.83 0 top
U23  AP2127K-1.8V  [SOT23-5]  42.93,73.91 180 top
U24  [VSSOP_8PIN]  49.28,68.83 0 top
U25  AP2127K-1.8V  [SOT23-5]  68.83,73.91 180 top
U26  [VSSOP_8PIN]  75.18,68.83 0 top
U27  AP2127K-1.8V  [SOT23-5]  94.74,73.91 180 top
U28  [VSSOP_8PIN]  101.09,68.83 0 top
U29  AP2127K-1.8V  [SOT23-5]  120.65,73.91 180 top
U30  [VSSOP_8PIN]  127,68.83 0 top
U31  AP2127K-1.8V  [SOT23-5]  17.02,99.82 180 top
U32  [VSSOP_8PIN]  23.37,94.74 0 top
U33  AP2127K-1.8V  [SOT23-5]  42.93,99.82 180 top
U34  [VSSOP_8PIN]  49.28,94.74 0 top
U35  AP2127K-1.8V  [SOT23-5]  68.83,99.82 180 top
U36  [VSSOP_8PIN]  75.18,94.74 0 top
U37  AP2127K-1.8V  [SOT23-5]  94.74,99.82 180 top
U38  [VSSOP_8PIN]  101.09,94.74 0 top
U39  AP2127K-1.8V  [SOT23-5]  120.65,99.82 180 top
U40  [VSSOP_8PIN]  127,94.74 0 top
U41  AP2127K-1.8V  [SOT23-5]  17.02,125.73 180 top
U42  [VSSOP_8PIN]  23.37,120.65 0 top
U43  AP2127K-1.8V  [SOT23-5]  42.93,125.73 180 top
U44  [VSSOP_8PIN]  49.28,120.65 0 top
U45  AP2127K-1.8V  [SOT23-5]  68.83,125.73 180 top
U46  [VSSOP_8PIN]  75.18,120.65 0 top
U47  AP2127K-1.8V  [SOT23-5]  94.74,125.73 180 top
U48  [VSSOP_8PIN]  101.09,120.65 0 top
U49  AP2127K-1.8V  [SOT23-5]  120.65,125.73 180 top
U50  [VSSOP_8PIN]  127,120.65 0 top
U$1  [#_GND#0]  15.75,8.38 90 top
U$2  [STAND-OFF]  9.4,29.72 0 top
U$3  [STAND-OFF]  29.72,29.72 0 top
U$4  [STAND-OFF]  29.72,9.4 0 top
U$5  [STAND-OFF]  9.4,9.4 0 top
U$6  [#_1V8#0]  18.29,8.38 90 top
U$7  [#_SDA#0]  20.83,8.38 90 top
U$8  [#_SCL#0]  23.37,8.38 90 top
U$9  [PWR0]  9.4,12.32 0 top
U$10  [#GND_#0]  14.48,30.73 90 top
U$11  [#3V3_#0]  17.02,30.73 90 top
U$12  [#SDA_#0]  19.56,30.73 90 top
U$13  [#SCL_#0]  22.1,30.61 90 top
U$14  [#EN_#0]  24.64,30.61 90 top
U$15  [1#8V0]  19.56,14.48 0 top
U$16  [QWIIC_4MM]  29.72,24.64 0 top
U$17  [#_GND#0]  15.75,8.38 90 bottom
U$18  [#_1V8#0]  18.29,8.38 90 bottom
U$19  [#_SDA#0]  20.83,8.38 90 bottom
U$20  [#_SCL#0]  23.37,8.38 90 bottom
U$21  [#GND_#0]  14.48,30.73 90 bottom
U$22  [#3V3_#0]  17.02,30.73 90 bottom
U$23  [#SDA_#0]  19.56,30.73 90 bottom
U$24  [#SCL_#0]  22.1,30.61 90 bottom
U$25  [#EN_#0]  24.64,30.61 90 bottom
U$26  [1#8V0]  19.56,14.48 0 bottom
U$27  [#EN#0]  26.42,24.64 0 bottom
U$28  [QWIIC_1#8V_ADAPTER0]  19.56,18.29 0 bottom
U$29  [SPARKX-SMALL]  19.56,20.83 0 bottom
U$30  [#LED#0]  12.45,24.64 0 bottom
U$31  [STAND-OFF]  35.31,29.72 0 top
U$32  [STAND-OFF]  55.63,29.72 0 top
U$33  [STAND-OFF]  55.63,9.4 0 top
U$34  [STAND-OFF]  35.31,9.4 0 top
U$35  [#_GND#0]  41.66,8.38 90 top
U$36  [#_1V8#0]  44.2,8.38 90 top
U$37  [#_SDA#0]  46.74,8.38 90 top
U$38  [#_SCL#0]  49.28,8.38 90 top
U$39  [PWR0]  35.31,12.32 0 top
U$40  [#GND_#0]  40.39,30.73 90 top
U$41  [#3V3_#0]  42.93,30.73 90 top
U$42  [#SDA_#0]  45.47,30.73 90 top
U$43  [#SCL_#0]  48.01,30.61 90 top
U$44  [#EN_#0]  50.55,30.61 90 top
U$45  [1#8V0]  45.47,14.48 0 top
U$46  [QWIIC_4MM]  55.63,24.64 0 top
U$47  [#_GND#0]  41.66,8.38 90 bottom
U$48  [#_1V8#0]  44.2,8.38 90 bottom
U$49  [#_SDA#0]  46.74,8.38 90 bottom
U$50  [#_SCL#0]  49.28,8.38 90 bottom
U$51  [#GND_#0]  40.39,30.73 90 bottom
U$52  [#3V3_#0]  42.93,30.73 90 bottom
U$53  [#SDA_#0]  45.47,30.73 90 bottom
U$54  [#SCL_#0]  48.01,30.61 90 bottom
U$55  [#EN_#0]  50.55,30.61 90 bottom
U$56  [1#8V0]  45.47,14.48 0 bottom
U$57  [#EN#0]  52.32,24.64 0 bottom
U$58  [QWIIC_1#8V_ADAPTER0]  45.47,18.29 0 bottom
U$59  [SPARKX-SMALL]  45.47,20.83 0 bottom
U$60  [#LED#0]  38.35,24.64 0 bottom
U$61  [STAND-OFF]  61.21,29.72 0 top
U$62  [STAND-OFF]  81.53,29.72 0 top
U$63  [STAND-OFF]  81.53,9.4 0 top
U$64  [STAND-OFF]  61.21,9.4 0 top
U$65  [#_GND#0]  67.56,8.38 90 top
U$66  [#_1V8#0]  70.1,8.38 90 top
U$67  [#_SDA#0]  72.64,8.38 90 top
U$68  [#_SCL#0]  75.18,8.38 90 top
U$69  [PWR0]  61.21,12.32 0 top
U$70  [#GND_#0]  66.29,30.73 90 top
U$71  [#3V3_#0]  68.83,30.73 90 top
U$72  [#SDA_#0]  71.37,30.73 90 top
U$73  [#SCL_#0]  73.91,30.61 90 top
U$74  [#EN_#0]  76.45,30.61 90 top
U$75  [1#8V0]  71.37,14.48 0 top
U$76  [QWIIC_4MM]  81.53,24.64 0 top
U$77  [#_GND#0]  67.56,8.38 90 bottom
U$78  [#_1V8#0]  70.1,8.38 90 bottom
U$79  [#_SDA#0]  72.64,8.38 90 bottom
U$80  [#_SCL#0]  75.18,8.38 90 bottom
U$81  [#GND_#0]  66.29,30.73 90 bottom
U$82  [#3V3_#0]  68.83,30.73 90 bottom
U$83  [#SDA_#0]  71.37,30.73 90 bottom
U$84  [#SCL_#0]  73.91,30.61 90 bottom
U$85  [#EN_#0]  76.45,30.61 90 bottom
U$86  [1#8V0]  71.37,14.48 0 bottom
U$87  [#EN#0]  78.23,24.64 0 bottom
U$88  [QWIIC_1#8V_ADAPTER0]  71.37,18.29 0 bottom
U$89  [SPARKX-SMALL]  71.37,20.83 0 bottom
U$90  [#LED#0]  64.26,24.64 0 bottom
U$91  [STAND-OFF]  87.12,29.72 0 top
U$92  [STAND-OFF]  107.44,29.72 0 top
U$93  [STAND-OFF]  107.44,9.4 0 top
U$94  [STAND-OFF]  87.12,9.4 0 top
U$95  [#_GND#0]  93.47,8.38 90 top
U$96  [#_1V8#0]  96.01,8.38 90 top
U$97  [#_SDA#0]  98.55,8.38 90 top
U$98  [#_SCL#0]  101.09,8.38 90 top
U$99  [PWR0]  87.12,12.32 0 top
U$100  [#GND_#0]  92.2,30.73 90 top
U$101  [#3V3_#0]  94.74,30.73 90 top
U$102  [#SDA_#0]  97.28,30.73 90 top
U$103  [#SCL_#0]  99.82,30.61 90 top
U$104  [#EN_#0]  102.36,30.61 90 top
U$105  [1#8V0]  97.28,14.48 0 top
U$106  [QWIIC_4MM]  107.44,24.64 0 top
U$107  [#_GND#0]  93.47,8.38 90 bottom
U$108  [#_1V8#0]  96.01,8.38 90 bottom
U$109  [#_SDA#0]  98.55,8.38 90 bottom
U$110  [#_SCL#0]  101.09,8.38 90 bottom
U$111  [#GND_#0]  92.2,30.73 90 bottom
U$112  [#3V3_#0]  94.74,30.73 90 bottom
U$113  [#SDA_#0]  97.28,30.73 90 bottom
U$114  [#SCL_#0]  99.82,30.61 90 bottom
U$115  [#EN_#0]  102.36,30.61 90 bottom
U$116  [1#8V0]  97.28,14.48 0 bottom
U$117  [#EN#0]  104.14,24.64 0 bottom
U$118  [QWIIC_1#8V_ADAPTER0]  97.28,18.29 0 bottom
U$119  [SPARKX-SMALL]  97.28,20.83 0 bottom
U$120  [#LED#0]  90.17,24.64 0 bottom
U$121  [STAND-OFF]  113.03,29.72 0 top
U$122  [STAND-OFF]  133.35,29.72 0 top
U$123  [STAND-OFF]  133.35,9.4 0 top
U$124  [STAND-OFF]  113.03,9.4 0 top
U$125  [#_GND#0]  119.38,8.38 90 top
U$126  [#_1V8#0]  121.92,8.38 90 top
U$127  [#_SDA#0]  124.46,8.38 90 top
U$128  [#_SCL#0]  127,8.38 90 top
U$129  [PWR0]  113.03,12.32 0 top
U$130  [#GND_#0]  118.11,30.73 90 top
U$131  [#3V3_#0]  120.65,30.73 90 top
U$132  [#SDA_#0]  123.19,30.73 90 top
U$133  [#SCL_#0]  125.73,30.61 90 top
U$134  [#EN_#0]  128.27,30.61 90 top
U$135  [1#8V0]  123.19,14.48 0 top
U$136  [QWIIC_4MM]  133.35,24.64 0 top
U$137  [#_GND#0]  119.38,8.38 90 bottom
U$138  [#_1V8#0]  121.92,8.38 90 bottom
U$139  [#_SDA#0]  124.46,8.38 90 bottom
U$140  [#_SCL#0]  127,8.38 90 bottom
U$141  [#GND_#0]  118.11,30.73 90 bottom
U$142  [#3V3_#0]  120.65,30.73 90 bottom
U$143  [#SDA_#0]  123.19,30.73 90 bottom
U$144  [#SCL_#0]  125.73,30.61 90 bottom
U$145  [#EN_#0]  128.27,30.61 90 bottom
U$146  [1#8V0]  123.19,14.48 0 bottom
U$147  [#EN#0]  130.05,24.64 0 bottom
U$148  [QWIIC_1#8V_ADAPTER0]  123.19,18.29 0 bottom
U$149  [SPARKX-SMALL]  123.19,20.83 0 bottom
U$150  [#LED#0]  116.08,24.64 0 bottom
U$151  [STAND-OFF]  9.4,55.63 0 top
U$152  [STAND-OFF]  29.72,55.63 0 top
U$153  [STAND-OFF]  29.72,35.31 0 top
U$154  [STAND-OFF]  9.4,35.31 0 top
U$155  [#_GND#0]  15.75,34.29 90 top
U$156  [#_1V8#0]  18.29,34.29 90 top
U$157  [#_SDA#0]  20.83,34.29 90 top
U$158  [#_SCL#0]  23.37,34.29 90 top
U$159  [PWR0]  9.4,38.23 0 top
U$160  [#GND_#0]  14.48,56.64 90 top
U$161  [#3V3_#0]  17.02,56.64 90 top
U$162  [#SDA_#0]  19.56,56.64 90 top
U$163  [#SCL_#0]  22.1,56.51 90 top
U$164  [#EN_#0]  24.64,56.51 90 top
U$165  [1#8V0]  19.56,40.39 0 top
U$166  [QWIIC_4MM]  29.72,50.55 0 top
U$167  [#_GND#0]  15.75,34.29 90 bottom
U$168  [#_1V8#0]  18.29,34.29 90 bottom
U$169  [#_SDA#0]  20.83,34.29 90 bottom
U$170  [#_SCL#0]  23.37,34.29 90 bottom
U$171  [#GND_#0]  14.48,56.64 90 bottom
U$172  [#3V3_#0]  17.02,56.64 90 bottom
U$173  [#SDA_#0]  19.56,56.64 90 bottom
U$174  [#SCL_#0]  22.1,56.51 90 bottom
U$175  [#EN_#0]  24.64,56.51 90 bottom
U$176  [1#8V0]  19.56,40.39 0 bottom
U$177  [#EN#0]  26.42,50.55 0 bottom
U$178  [QWIIC_1#8V_ADAPTER0]  19.56,44.2 0 bottom
U$179  [SPARKX-SMALL]  19.56,46.74 0 bottom
U$180  [#LED#0]  12.45,50.55 0 bottom
U$181  [STAND-OFF]  35.31,55.63 0 top
U$182  [STAND-OFF]  55.63,55.63 0 top
U$183  [STAND-OFF]  55.63,35.31 0 top
U$184  [STAND-OFF]  35.31,35.31 0 top
U$185  [#_GND#0]  41.66,34.29 90 top
U$186  [#_1V8#0]  44.2,34.29 90 top
U$187  [#_SDA#0]  46.74,34.29 90 top
U$188  [#_SCL#0]  49.28,34.29 90 top
U$189  [PWR0]  35.31,38.23 0 top
U$190  [#GND_#0]  40.39,56.64 90 top
U$191  [#3V3_#0]  42.93,56.64 90 top
U$192  [#SDA_#0]  45.47,56.64 90 top
U$193  [#SCL_#0]  48.01,56.51 90 top
U$194  [#EN_#0]  50.55,56.51 90 top
U$195  [1#8V0]  45.47,40.39 0 top
U$196  [QWIIC_4MM]  55.63,50.55 0 top
U$197  [#_GND#0]  41.66,34.29 90 bottom
U$198  [#_1V8#0]  44.2,34.29 90 bottom
U$199  [#_SDA#0]  46.74,34.29 90 bottom
U$200  [#_SCL#0]  49.28,34.29 90 bottom
U$201  [#GND_#0]  40.39,56.64 90 bottom
U$202  [#3V3_#0]  42.93,56.64 90 bottom
U$203  [#SDA_#0]  45.47,56.64 90 bottom
U$204  [#SCL_#0]  48.01,56.51 90 bottom
U$205  [#EN_#0]  50.55,56.51 90 bottom
U$206  [1#8V0]  45.47,40.39 0 bottom
U$207  [#EN#0]  52.32,50.55 0 bottom
U$208  [QWIIC_1#8V_ADAPTER0]  45.47,44.2 0 bottom
U$209  [SPARKX-SMALL]  45.47,46.74 0 bottom
U$210  [#LED#0]  38.35,50.55 0 bottom
U$211  [STAND-OFF]  61.21,55.63 0 top
U$212  [STAND-OFF]  81.53,55.63 0 top
U$213  [STAND-OFF]  81.53,35.31 0 top
U$214  [STAND-OFF]  61.21,35.31 0 top
U$215  [#_GND#0]  67.56,34.29 90 top
U$216  [#_1V8#0]  70.1,34.29 90 top
U$217  [#_SDA#0]  72.64,34.29 90 top
U$218  [#_SCL#0]  75.18,34.29 90 top
U$219  [PWR0]  61.21,38.23 0 top
U$220  [#GND_#0]  66.29,56.64 90 top
U$221  [#3V3_#0]  68.83,56.64 90 top
U$222  [#SDA_#0]  71.37,56.64 90 top
U$223  [#SCL_#0]  73.91,56.51 90 top
U$224  [#EN_#0]  76.45,56.51 90 top
U$225  [1#8V0]  71.37,40.39 0 top
U$226  [QWIIC_4MM]  81.53,50.55 0 top
U$227  [#_GND#0]  67.56,34.29 90 bottom
U$228  [#_1V8#0]  70.1,34.29 90 bottom
U$229  [#_SDA#0]  72.64,34.29 90 bottom
U$230  [#_SCL#0]  75.18,34.29 90 bottom
U$231  [#GND_#0]  66.29,56.64 90 bottom
U$232  [#3V3_#0]  68.83,56.64 90 bottom
U$233  [#SDA_#0]  71.37,56.64 90 bottom
U$234  [#SCL_#0]  73.91,56.51 90 bottom
U$235  [#EN_#0]  76.45,56.51 90 bottom
U$236  [1#8V0]  71.37,40.39 0 bottom
U$237  [#EN#0]  78.23,50.55 0 bottom
U$238  [QWIIC_1#8V_ADAPTER0]  71.37,44.2 0 bottom
U$239  [SPARKX-SMALL]  71.37,46.74 0 bottom
U$240  [#LED#0]  64.26,50.55 0 bottom
U$241  [STAND-OFF]  87.12,55.63 0 top
U$242  [STAND-OFF]  107.44,55.63 0 top
U$243  [STAND-OFF]  107.44,35.31 0 top
U$244  [STAND-OFF]  87.12,35.31 0 top
U$245  [#_GND#0]  93.47,34.29 90 top
U$246  [#_1V8#0]  96.01,34.29 90 top
U$247  [#_SDA#0]  98.55,34.29 90 top
U$248  [#_SCL#0]  101.09,34.29 90 top
U$249  [PWR0]  87.12,38.23 0 top
U$250  [#GND_#0]  92.2,56.64 90 top
U$251  [#3V3_#0]  94.74,56.64 90 top
U$252  [#SDA_#0]  97.28,56.64 90 top
U$253  [#SCL_#0]  99.82,56.51 90 top
U$254  [#EN_#0]  102.36,56.51 90 top
U$255  [1#8V0]  97.28,40.39 0 top
U$256  [QWIIC_4MM]  107.44,50.55 0 top
U$257  [#_GND#0]  93.47,34.29 90 bottom
U$258  [#_1V8#0]  96.01,34.29 90 bottom
U$259  [#_SDA#0]  98.55,34.29 90 bottom
U$260  [#_SCL#0]  101.09,34.29 90 bottom
U$261  [#GND_#0]  92.2,56.64 90 bottom
U$262  [#3V3_#0]  94.74,56.64 90 bottom
U$263  [#SDA_#0]  97.28,56.64 90 bottom
U$264  [#SCL_#0]  99.82,56.51 90 bottom
U$265  [#EN_#0]  102.36,56.51 90 bottom
U$266  [1#8V0]  97.28,40.39 0 bottom
U$267  [#EN#0]  104.14,50.55 0 bottom
U$268  [QWIIC_1#8V_ADAPTER0]  97.28,44.2 0 bottom
U$269  [SPARKX-SMALL]  97.28,46.74 0 bottom
U$270  [#LED#0]  90.17,50.55 0 bottom
U$271  [STAND-OFF]  113.03,55.63 0 top
U$272  [STAND-OFF]  133.35,55.63 0 top
U$273  [STAND-OFF]  133.35,35.31 0 top
U$274  [STAND-OFF]  113.03,35.31 0 top
U$275  [#_GND#0]  119.38,34.29 90 top
U$276  [#_1V8#0]  121.92,34.29 90 top
U$277  [#_SDA#0]  124.46,34.29 90 top
U$278  [#_SCL#0]  127,34.29 90 top
U$279  [PWR0]  113.03,38.23 0 top
U$280  [#GND_#0]  118.11,56.64 90 top
U$281  [#3V3_#0]  120.65,56.64 90 top
U$282  [#SDA_#0]  123.19,56.64 90 top
U$283  [#SCL_#0]  125.73,56.51 90 top
U$284  [#EN_#0]  128.27,56.51 90 top
U$285  [1#8V0]  123.19,40.39 0 top
U$286  [QWIIC_4MM]  133.35,50.55 0 top
U$287  [#_GND#0]  119.38,34.29 90 bottom
U$288  [#_1V8#0]  121.92,34.29 90 bottom
U$289  [#_SDA#0]  124.46,34.29 90 bottom
U$290  [#_SCL#0]  127,34.29 90 bottom
U$291  [#GND_#0]  118.11,56.64 90 bottom
U$292  [#3V3_#0]  120.65,56.64 90 bottom
U$293  [#SDA_#0]  123.19,56.64 90 bottom
U$294  [#SCL_#0]  125.73,56.51 90 bottom
U$295  [#EN_#0]  128.27,56.51 90 bottom
U$296  [1#8V0]  123.19,40.39 0 bottom
U$297  [#EN#0]  130.05,50.55 0 bottom
U$298  [QWIIC_1#8V_ADAPTER0]  123.19,44.2 0 bottom
U$299  [SPARKX-SMALL]  123.19,46.74 0 bottom
U$300  [#LED#0]  116.08,50.55 0 bottom
U$301  [STAND-OFF]  9.4,81.53 0 top
U$302  [STAND-OFF]  29.72,81.53 0 top
U$303  [STAND-OFF]  29.72,61.21 0 top
U$304  [STAND-OFF]  9.4,61.21 0 top
U$305  [#_GND#0]  15.75,60.2 90 top
U$306  [#_1V8#0]  18.29,60.2 90 top
U$307  [#_SDA#0]  20.83,60.2 90 top
U$308  [#_SCL#0]  23.37,60.2 90 top
U$309  [PWR0]  9.4,64.14 0 top
U$310  [#GND_#0]  14.48,82.55 90 top
U$311  [#3V3_#0]  17.02,82.55 90 top
U$312  [#SDA_#0]  19.56,82.55 90 top
U$313  [#SCL_#0]  22.1,82.42 90 top
U$314  [#EN_#0]  24.64,82.42 90 top
U$315  [1#8V0]  19.56,66.29 0 top
U$316  [QWIIC_4MM]  29.72,76.45 0 top
U$317  [#_GND#0]  15.75,60.2 90 bottom
U$318  [#_1V8#0]  18.29,60.2 90 bottom
U$319  [#_SDA#0]  20.83,60.2 90 bottom
U$320  [#_SCL#0]  23.37,60.2 90 bottom
U$321  [#GND_#0]  14.48,82.55 90 bottom
U$322  [#3V3_#0]  17.02,82.55 90 bottom
U$323  [#SDA_#0]  19.56,82.55 90 bottom
U$324  [#SCL_#0]  22.1,82.42 90 bottom
U$325  [#EN_#0]  24.64,82.42 90 bottom
U$326  [1#8V0]  19.56,66.29 0 bottom
U$327  [#EN#0]  26.42,76.45 0 bottom
U$328  [QWIIC_1#8V_ADAPTER0]  19.56,70.1 0 bottom
U$329  [SPARKX-SMALL]  19.56,72.64 0 bottom
U$330  [#LED#0]  12.45,76.45 0 bottom
U$331  [STAND-OFF]  35.31,81.53 0 top
U$332  [STAND-OFF]  55.63,81.53 0 top
U$333  [STAND-OFF]  55.63,61.21 0 top
U$334  [STAND-OFF]  35.31,61.21 0 top
U$335  [#_GND#0]  41.66,60.2 90 top
U$336  [#_1V8#0]  44.2,60.2 90 top
U$337  [#_SDA#0]  46.74,60.2 90 top
U$338  [#_SCL#0]  49.28,60.2 90 top
U$339  [PWR0]  35.31,64.14 0 top
U$340  [#GND_#0]  40.39,82.55 90 top
U$341  [#3V3_#0]  42.93,82.55 90 top
U$342  [#SDA_#0]  45.47,82.55 90 top
U$343  [#SCL_#0]  48.01,82.42 90 top
U$344  [#EN_#0]  50.55,82.42 90 top
U$345  [1#8V0]  45.47,66.29 0 top
U$346  [QWIIC_4MM]  55.63,76.45 0 top
U$347  [#_GND#0]  41.66,60.2 90 bottom
U$348  [#_1V8#0]  44.2,60.2 90 bottom
U$349  [#_SDA#0]  46.74,60.2 90 bottom
U$350  [#_SCL#0]  49.28,60.2 90 bottom
U$351  [#GND_#0]  40.39,82.55 90 bottom
U$352  [#3V3_#0]  42.93,82.55 90 bottom
U$353  [#SDA_#0]  45.47,82.55 90 bottom
U$354  [#SCL_#0]  48.01,82.42 90 bottom
U$355  [#EN_#0]  50.55,82.42 90 bottom
U$356  [1#8V0]  45.47,66.29 0 bottom
U$357  [#EN#0]  52.32,76.45 0 bottom
U$358  [QWIIC_1#8V_ADAPTER0]  45.47,70.1 0 bottom
U$359  [SPARKX-SMALL]  45.47,72.64 0 bottom
U$360  [#LED#0]  38.35,76.45 0 bottom
U$361  [STAND-OFF]  61.21,81.53 0 top
U$362  [STAND-OFF]  81.53,81.53 0 top
U$363  [STAND-OFF]  81.53,61.21 0 top
U$364  [STAND-OFF]  61.21,61.21 0 top
U$365  [#_GND#0]  67.56,60.2 90 top
U$366  [#_1V8#0]  70.1,60.2 90 top
U$367  [#_SDA#0]  72.64,60.2 90 top
U$368  [#_SCL#0]  75.18,60.2 90 top
U$369  [PWR0]  61.21,64.14 0 top
U$370  [#GND_#0]  66.29,82.55 90 top
U$371  [#3V3_#0]  68.83,82.55 90 top
U$372  [#SDA_#0]  71.37,82.55 90 top
U$373  [#SCL_#0]  73.91,82.42 90 top
U$374  [#EN_#0]  76.45,82.42 90 top
U$375  [1#8V0]  71.37,66.29 0 top
U$376  [QWIIC_4MM]  81.53,76.45 0 top
U$377  [#_GND#0]  67.56,60.2 90 bottom
U$378  [#_1V8#0]  70.1,60.2 90 bottom
U$379  [#_SDA#0]  72.64,60.2 90 bottom
U$380  [#_SCL#0]  75.18,60.2 90 bottom
U$381  [#GND_#0]  66.29,82.55 90 bottom
U$382  [#3V3_#0]  68.83,82.55 90 bottom
U$383  [#SDA_#0]  71.37,82.55 90 bottom
U$384  [#SCL_#0]  73.91,82.42 90 bottom
U$385  [#EN_#0]  76.45,82.42 90 bottom
U$386  [1#8V0]  71.37,66.29 0 bottom
U$387  [#EN#0]  78.23,76.45 0 bottom
U$388  [QWIIC_1#8V_ADAPTER0]  71.37,70.1 0 bottom
U$389  [SPARKX-SMALL]  71.37,72.64 0 bottom
U$390  [#LED#0]  64.26,76.45 0 bottom
U$391  [STAND-OFF]  87.12,81.53 0 top
U$392  [STAND-OFF]  107.44,81.53 0 top
U$393  [STAND-OFF]  107.44,61.21 0 top
U$394  [STAND-OFF]  87.12,61.21 0 top
U$395  [#_GND#0]  93.47,60.2 90 top
U$396  [#_1V8#0]  96.01,60.2 90 top
U$397  [#_SDA#0]  98.55,60.2 90 top
U$398  [#_SCL#0]  101.09,60.2 90 top
U$399  [PWR0]  87.12,64.14 0 top
U$400  [#GND_#0]  92.2,82.55 90 top
U$401  [#3V3_#0]  94.74,82.55 90 top
U$402  [#SDA_#0]  97.28,82.55 90 top
U$403  [#SCL_#0]  99.82,82.42 90 top
U$404  [#EN_#0]  102.36,82.42 90 top
U$405  [1#8V0]  97.28,66.29 0 top
U$406  [QWIIC_4MM]  107.44,76.45 0 top
U$407  [#_GND#0]  93.47,60.2 90 bottom
U$408  [#_1V8#0]  96.01,60.2 90 bottom
U$409  [#_SDA#0]  98.55,60.2 90 bottom
U$410  [#_SCL#0]  101.09,60.2 90 bottom
U$411  [#GND_#0]  92.2,82.55 90 bottom
U$412  [#3V3_#0]  94.74,82.55 90 bottom
U$413  [#SDA_#0]  97.28,82.55 90 bottom
U$414  [#SCL_#0]  99.82,82.42 90 bottom
U$415  [#EN_#0]  102.36,82.42 90 bottom
U$416  [1#8V0]  97.28,66.29 0 bottom
U$417  [#EN#0]  104.14,76.45 0 bottom
U$418  [QWIIC_1#8V_ADAPTER0]  97.28,70.1 0 bottom
U$419  [SPARKX-SMALL]  97.28,72.64 0 bottom
U$420  [#LED#0]  90.17,76.45 0 bottom
U$421  [STAND-OFF]  113.03,81.53 0 top
U$422  [STAND-OFF]  133.35,81.53 0 top
U$423  [STAND-OFF]  133.35,61.21 0 top
U$424  [STAND-OFF]  113.03,61.21 0 top
U$425  [#_GND#0]  119.38,60.2 90 top
U$426  [#_1V8#0]  121.92,60.2 90 top
U$427  [#_SDA#0]  124.46,60.2 90 top
U$428  [#_SCL#0]  127,60.2 90 top
U$429  [PWR0]  113.03,64.14 0 top
U$430  [#GND_#0]  118.11,82.55 90 top
U$431  [#3V3_#0]  120.65,82.55 90 top
U$432  [#SDA_#0]  123.19,82.55 90 top
U$433  [#SCL_#0]  125.73,82.42 90 top
U$434  [#EN_#0]  128.27,82.42 90 top
U$435  [1#8V0]  123.19,66.29 0 top
U$436  [QWIIC_4MM]  133.35,76.45 0 top
U$437  [#_GND#0]  119.38,60.2 90 bottom
U$438  [#_1V8#0]  121.92,60.2 90 bottom
U$439  [#_SDA#0]  124.46,60.2 90 bottom
U$440  [#_SCL#0]  127,60.2 90 bottom
U$441  [#GND_#0]  118.11,82.55 90 bottom
U$442  [#3V3_#0]  120.65,82.55 90 bottom
U$443  [#SDA_#0]  123.19,82.55 90 bottom
U$444  [#SCL_#0]  125.73,82.42 90 bottom
U$445  [#EN_#0]  128.27,82.42 90 bottom
U$446  [1#8V0]  123.19,66.29 0 bottom
U$447  [#EN#0]  130.05,76.45 0 bottom
U$448  [QWIIC_1#8V_ADAPTER0]  123.19,70.1 0 bottom
U$449  [SPARKX-SMALL]  123.19,72.64 0 bottom
U$450  [#LED#0]  116.08,76.45 0 bottom
U$451  [STAND-OFF]  9.4,107.44 0 top
U$452  [STAND-OFF]  29.72,107.44 0 top
U$453  [STAND-OFF]  29.72,87.12 0 top
U$454  [STAND-OFF]  9.4,87.12 0 top
U$455  [#_GND#0]  15.75,86.11 90 top
U$456  [#_1V8#0]  18.29,86.11 90 top
U$457  [#_SDA#0]  20.83,86.11 90 top
U$458  [#_SCL#0]  23.37,86.11 90 top
U$459  [PWR0]  9.4,90.04 0 top
U$460  [#GND_#0]  14.48,108.46 90 top
U$461  [#3V3_#0]  17.02,108.46 90 top
U$462  [#SDA_#0]  19.56,108.46 90 top
U$463  [#SCL_#0]  22.1,108.33 90 top
U$464  [#EN_#0]  24.64,108.33 90 top
U$465  [1#8V0]  19.56,92.2 0 top
U$466  [QWIIC_4MM]  29.72,102.36 0 top
U$467  [#_GND#0]  15.75,86.11 90 bottom
U$468  [#_1V8#0]  18.29,86.11 90 bottom
U$469  [#_SDA#0]  20.83,86.11 90 bottom
U$470  [#_SCL#0]  23.37,86.11 90 bottom
U$471  [#GND_#0]  14.48,108.46 90 bottom
U$472  [#3V3_#0]  17.02,108.46 90 bottom
U$473  [#SDA_#0]  19.56,108.46 90 bottom
U$474  [#SCL_#0]  22.1,108.33 90 bottom
U$475  [#EN_#0]  24.64,108.33 90 bottom
U$476  [1#8V0]  19.56,92.2 0 bottom
U$477  [#EN#0]  26.42,102.36 0 bottom
U$478  [QWIIC_1#8V_ADAPTER0]  19.56,96.01 0 bottom
U$479  [SPARKX-SMALL]  19.56,98.55 0 bottom
U$480  [#LED#0]  12.45,102.36 0 bottom
U$481  [STAND-OFF]  35.31,107.44 0 top
U$482  [STAND-OFF]  55.63,107.44 0 top
U$483  [STAND-OFF]  55.63,87.12 0 top
U$484  [STAND-OFF]  35.31,87.12 0 top
U$485  [#_GND#0]  41.66,86.11 90 top
U$486  [#_1V8#0]  44.2,86.11 90 top
U$487  [#_SDA#0]  46.74,86.11 90 top
U$488  [#_SCL#0]  49.28,86.11 90 top
U$489  [PWR0]  35.31,90.04 0 top
U$490  [#GND_#0]  40.39,108.46 90 top
U$491  [#3V3_#0]  42.93,108.46 90 top
U$492  [#SDA_#0]  45.47,108.46 90 top
U$493  [#SCL_#0]  48.01,108.33 90 top
U$494  [#EN_#0]  50.55,108.33 90 top
U$495  [1#8V0]  45.47,92.2 0 top
U$496  [QWIIC_4MM]  55.63,102.36 0 top
U$497  [#_GND#0]  41.66,86.11 90 bottom
U$498  [#_1V8#0]  44.2,86.11 90 bottom
U$499  [#_SDA#0]  46.74,86.11 90 bottom
U$500  [#_SCL#0]  49.28,86.11 90 bottom
U$501  [#GND_#0]  40.39,108.46 90 bottom
U$502  [#3V3_#0]  42.93,108.46 90 bottom
U$503  [#SDA_#0]  45.47,108.46 90 bottom
U$504  [#SCL_#0]  48.01,108.33 90 bottom
U$505  [#EN_#0]  50.55,108.33 90 bottom
U$506  [1#8V0]  45.47,92.2 0 bottom
U$507  [#EN#0]  52.32,102.36 0 bottom
U$508  [QWIIC_1#8V_ADAPTER0]  45.47,96.01 0 bottom
U$509  [SPARKX-SMALL]  45.47,98.55 0 bottom
U$510  [#LED#0]  38.35,102.36 0 bottom
U$511  [STAND-OFF]  61.21,107.44 0 top
U$512  [STAND-OFF]  81.53,107.44 0 top
U$513  [STAND-OFF]  81.53,87.12 0 top
U$514  [STAND-OFF]  61.21,87.12 0 top
U$515  [#_GND#0]  67.56,86.11 90 top
U$516  [#_1V8#0]  70.1,86.11 90 top
U$517  [#_SDA#0]  72.64,86.11 90 top
U$518  [#_SCL#0]  75.18,86.11 90 top
U$519  [PWR0]  61.21,90.04 0 top
U$520  [#GND_#0]  66.29,108.46 90 top
U$521  [#3V3_#0]  68.83,108.46 90 top
U$522  [#SDA_#0]  71.37,108.46 90 top
U$523  [#SCL_#0]  73.91,108.33 90 top
U$524  [#EN_#0]  76.45,108.33 90 top
U$525  [1#8V0]  71.37,92.2 0 top
U$526  [QWIIC_4MM]  81.53,102.36 0 top
U$527  [#_GND#0]  67.56,86.11 90 bottom
U$528  [#_1V8#0]  70.1,86.11 90 bottom
U$529  [#_SDA#0]  72.64,86.11 90 bottom
U$530  [#_SCL#0]  75.18,86.11 90 bottom
U$531  [#GND_#0]  66.29,108.46 90 bottom
U$532  [#3V3_#0]  68.83,108.46 90 bottom
U$533  [#SDA_#0]  71.37,108.46 90 bottom
U$534  [#SCL_#0]  73.91,108.33 90 bottom
U$535  [#EN_#0]  76.45,108.33 90 bottom
U$536  [1#8V0]  71.37,92.2 0 bottom
U$537  [#EN#0]  78.23,102.36 0 bottom
U$538  [QWIIC_1#8V_ADAPTER0]  71.37,96.01 0 bottom
U$539  [SPARKX-SMALL]  71.37,98.55 0 bottom
U$540  [#LED#0]  64.26,102.36 0 bottom
U$541  [STAND-OFF]  87.12,107.44 0 top
U$542  [STAND-OFF]  107.44,107.44 0 top
U$543  [STAND-OFF]  107.44,87.12 0 top
U$544  [STAND-OFF]  87.12,87.12 0 top
U$545  [#_GND#0]  93.47,86.11 90 top
U$546  [#_1V8#0]  96.01,86.11 90 top
U$547  [#_SDA#0]  98.55,86.11 90 top
U$548  [#_SCL#0]  101.09,86.11 90 top
U$549  [PWR0]  87.12,90.04 0 top
U$550  [#GND_#0]  92.2,108.46 90 top
U$551  [#3V3_#0]  94.74,108.46 90 top
U$552  [#SDA_#0]  97.28,108.46 90 top
U$553  [#SCL_#0]  99.82,108.33 90 top
U$554  [#EN_#0]  102.36,108.33 90 top
U$555  [1#8V0]  97.28,92.2 0 top
U$556  [QWIIC_4MM]  107.44,102.36 0 top
U$557  [#_GND#0]  93.47,86.11 90 bottom
U$558  [#_1V8#0]  96.01,86.11 90 bottom
U$559  [#_SDA#0]  98.55,86.11 90 bottom
U$560  [#_SCL#0]  101.09,86.11 90 bottom
U$561  [#GND_#0]  92.2,108.46 90 bottom
U$562  [#3V3_#0]  94.74,108.46 90 bottom
U$563  [#SDA_#0]  97.28,108.46 90 bottom
U$564  [#SCL_#0]  99.82,108.33 90 bottom
U$565  [#EN_#0]  102.36,108.33 90 bottom
U$566  [1#8V0]  97.28,92.2 0 bottom
U$567  [#EN#0]  104.14,102.36 0 bottom
U$568  [QWIIC_1#8V_ADAPTER0]  97.28,96.01 0 bottom
U$569  [SPARKX-SMALL]  97.28,98.55 0 bottom
U$570  [#LED#0]  90.17,102.36 0 bottom
U$571  [STAND-OFF]  113.03,107.44 0 top
U$572  [STAND-OFF]  133.35,107.44 0 top
U$573  [STAND-OFF]  133.35,87.12 0 top
U$574  [STAND-OFF]  113.03,87.12 0 top
U$575  [#_GND#0]  119.38,86.11 90 top
U$576  [#_1V8#0]  121.92,86.11 90 top
U$577  [#_SDA#0]  124.46,86.11 90 top
U$578  [#_SCL#0]  127,86.11 90 top
U$579  [PWR0]  113.03,90.04 0 top
U$580  [#GND_#0]  118.11,108.46 90 top
U$581  [#3V3_#0]  120.65,108.46 90 top
U$582  [#SDA_#0]  123.19,108.46 90 top
U$583  [#SCL_#0]  125.73,108.33 90 top
U$584  [#EN_#0]  128.27,108.33 90 top
U$585  [1#8V0]  123.19,92.2 0 top
U$586  [QWIIC_4MM]  133.35,102.36 0 top
U$587  [#_GND#0]  119.38,86.11 90 bottom
U$588  [#_1V8#0]  121.92,86.11 90 bottom
U$589  [#_SDA#0]  124.46,86.11 90 bottom
U$590  [#_SCL#0]  127,86.11 90 bottom
U$591  [#GND_#0]  118.11,108.46 90 bottom
U$592  [#3V3_#0]  120.65,108.46 90 bottom
U$593  [#SDA_#0]  123.19,108.46 90 bottom
U$594  [#SCL_#0]  125.73,108.33 90 bottom
U$595  [#EN_#0]  128.27,108.33 90 bottom
U$596  [1#8V0]  123.19,92.2 0 bottom
U$597  [#EN#0]  130.05,102.36 0 bottom
U$598  [QWIIC_1#8V_ADAPTER0]  123.19,96.01 0 bottom
U$599  [SPARKX-SMALL]  123.19,98.55 0 bottom
U$600  [#LED#0]  116.08,102.36 0 bottom
U$601  [STAND-OFF]  9.4,133.35 0 top
U$602  [STAND-OFF]  29.72,133.35 0 top
U$603  [STAND-OFF]  29.72,113.03 0 top
U$604  [STAND-OFF]  9.4,113.03 0 top
U$605  [#_GND#0]  15.75,112.01 90 top
U$606  [#_1V8#0]  18.29,112.01 90 top
U$607  [#_SDA#0]  20.83,112.01 90 top
U$608  [#_SCL#0]  23.37,112.01 90 top
U$609  [PWR0]  9.4,115.95 0 top
U$610  [#GND_#0]  14.48,134.37 90 top
U$611  [#3V3_#0]  17.02,134.37 90 top
U$612  [#SDA_#0]  19.56,134.37 90 top
U$613  [#SCL_#0]  22.1,134.24 90 top
U$614  [#EN_#0]  24.64,134.24 90 top
U$615  [1#8V0]  19.56,118.11 0 top
U$616  [QWIIC_4MM]  29.72,128.27 0 top
U$617  [#_GND#0]  15.75,112.01 90 bottom
U$618  [#_1V8#0]  18.29,112.01 90 bottom
U$619  [#_SDA#0]  20.83,112.01 90 bottom
U$620  [#_SCL#0]  23.37,112.01 90 bottom
U$621  [#GND_#0]  14.48,134.37 90 bottom
U$622  [#3V3_#0]  17.02,134.37 90 bottom
U$623  [#SDA_#0]  19.56,134.37 90 bottom
U$624  [#SCL_#0]  22.1,134.24 90 bottom
U$625  [#EN_#0]  24.64,134.24 90 bottom
U$626  [1#8V0]  19.56,118.11 0 bottom
U$627  [#EN#0]  26.42,128.27 0 bottom
U$628  [QWIIC_1#8V_ADAPTER0]  19.56,121.92 0 bottom
U$629  [SPARKX-SMALL]  19.56,124.46 0 bottom
U$630  [#LED#0]  12.45,128.27 0 bottom
U$631  [STAND-OFF]  35.31,133.35 0 top
U$632  [STAND-OFF]  55.63,133.35 0 top
U$633  [STAND-OFF]  55.63,113.03 0 top
U$634  [STAND-OFF]  35.31,113.03 0 top
U$635  [#_GND#0]  41.66,112.01 90 top
U$636  [#_1V8#0]  44.2,112.01 90 top
U$637  [#_SDA#0]  46.74,112.01 90 top
U$638  [#_SCL#0]  49.28,112.01 90 top
U$639  [PWR0]  35.31,115.95 0 top
U$640  [#GND_#0]  40.39,134.37 90 top
U$641  [#3V3_#0]  42.93,134.37 90 top
U$642  [#SDA_#0]  45.47,134.37 90 top
U$643  [#SCL_#0]  48.01,134.24 90 top
U$644  [#EN_#0]  50.55,134.24 90 top
U$645  [1#8V0]  45.47,118.11 0 top
U$646  [QWIIC_4MM]  55.63,128.27 0 top
U$647  [#_GND#0]  41.66,112.01 90 bottom
U$648  [#_1V8#0]  44.2,112.01 90 bottom
U$649  [#_SDA#0]  46.74,112.01 90 bottom
U$650  [#_SCL#0]  49.28,112.01 90 bottom
U$651  [#GND_#0]  40.39,134.37 90 bottom
U$652  [#3V3_#0]  42.93,134.37 90 bottom
U$653  [#SDA_#0]  45.47,134.37 90 bottom
U$654  [#SCL_#0]  48.01,134.24 90 bottom
U$655  [#EN_#0]  50.55,134.24 90 bottom
U$656  [1#8V0]  45.47,118.11 0 bottom
U$657  [#EN#0]  52.32,128.27 0 bottom
U$658  [QWIIC_1#8V_ADAPTER0]  45.47,121.92 0 bottom
U$659  [SPARKX-SMALL]  45.47,124.46 0 bottom
U$660  [#LED#0]  38.35,128.27 0 bottom
U$661  [STAND-OFF]  61.21,133.35 0 top
U$662  [STAND-OFF]  81.53,133.35 0 top
U$663  [STAND-OFF]  81.53,113.03 0 top
U$664  [STAND-OFF]  61.21,113.03 0 top
U$665  [#_GND#0]  67.56,112.01 90 top
U$666  [#_1V8#0]  70.1,112.01 90 top
U$667  [#_SDA#0]  72.64,112.01 90 top
U$668  [#_SCL#0]  75.18,112.01 90 top
U$669  [PWR0]  61.21,115.95 0 top
U$670  [#GND_#0]  66.29,134.37 90 top
U$671  [#3V3_#0]  68.83,134.37 90 top
U$672  [#SDA_#0]  71.37,134.37 90 top
U$673  [#SCL_#0]  73.91,134.24 90 top
U$674  [#EN_#0]  76.45,134.24 90 top
U$675  [1#8V0]  71.37,118.11 0 top
U$676  [QWIIC_4MM]  81.53,128.27 0 top
U$677  [#_GND#0]  67.56,112.01 90 bottom
U$678  [#_1V8#0]  70.1,112.01 90 bottom
U$679  [#_SDA#0]  72.64,112.01 90 bottom
U$680  [#_SCL#0]  75.18,112.01 90 bottom
U$681  [#GND_#0]  66.29,134.37 90 bottom
U$682  [#3V3_#0]  68.83,134.37 90 bottom
U$683  [#SDA_#0]  71.37,134.37 90 bottom
U$684  [#SCL_#0]  73.91,134.24 90 bottom
U$685  [#EN_#0]  76.45,134.24 90 bottom
U$686  [1#8V0]  71.37,118.11 0 bottom
U$687  [#EN#0]  78.23,128.27 0 bottom
U$688  [QWIIC_1#8V_ADAPTER0]  71.37,121.92 0 bottom
U$689  [SPARKX-SMALL]  71.37,124.46 0 bottom
U$690  [#LED#0]  64.26,128.27 0 bottom